# EAGLE board Qwiic_PT100-Panel (EAGLE 9.6.0), part 1 of 4
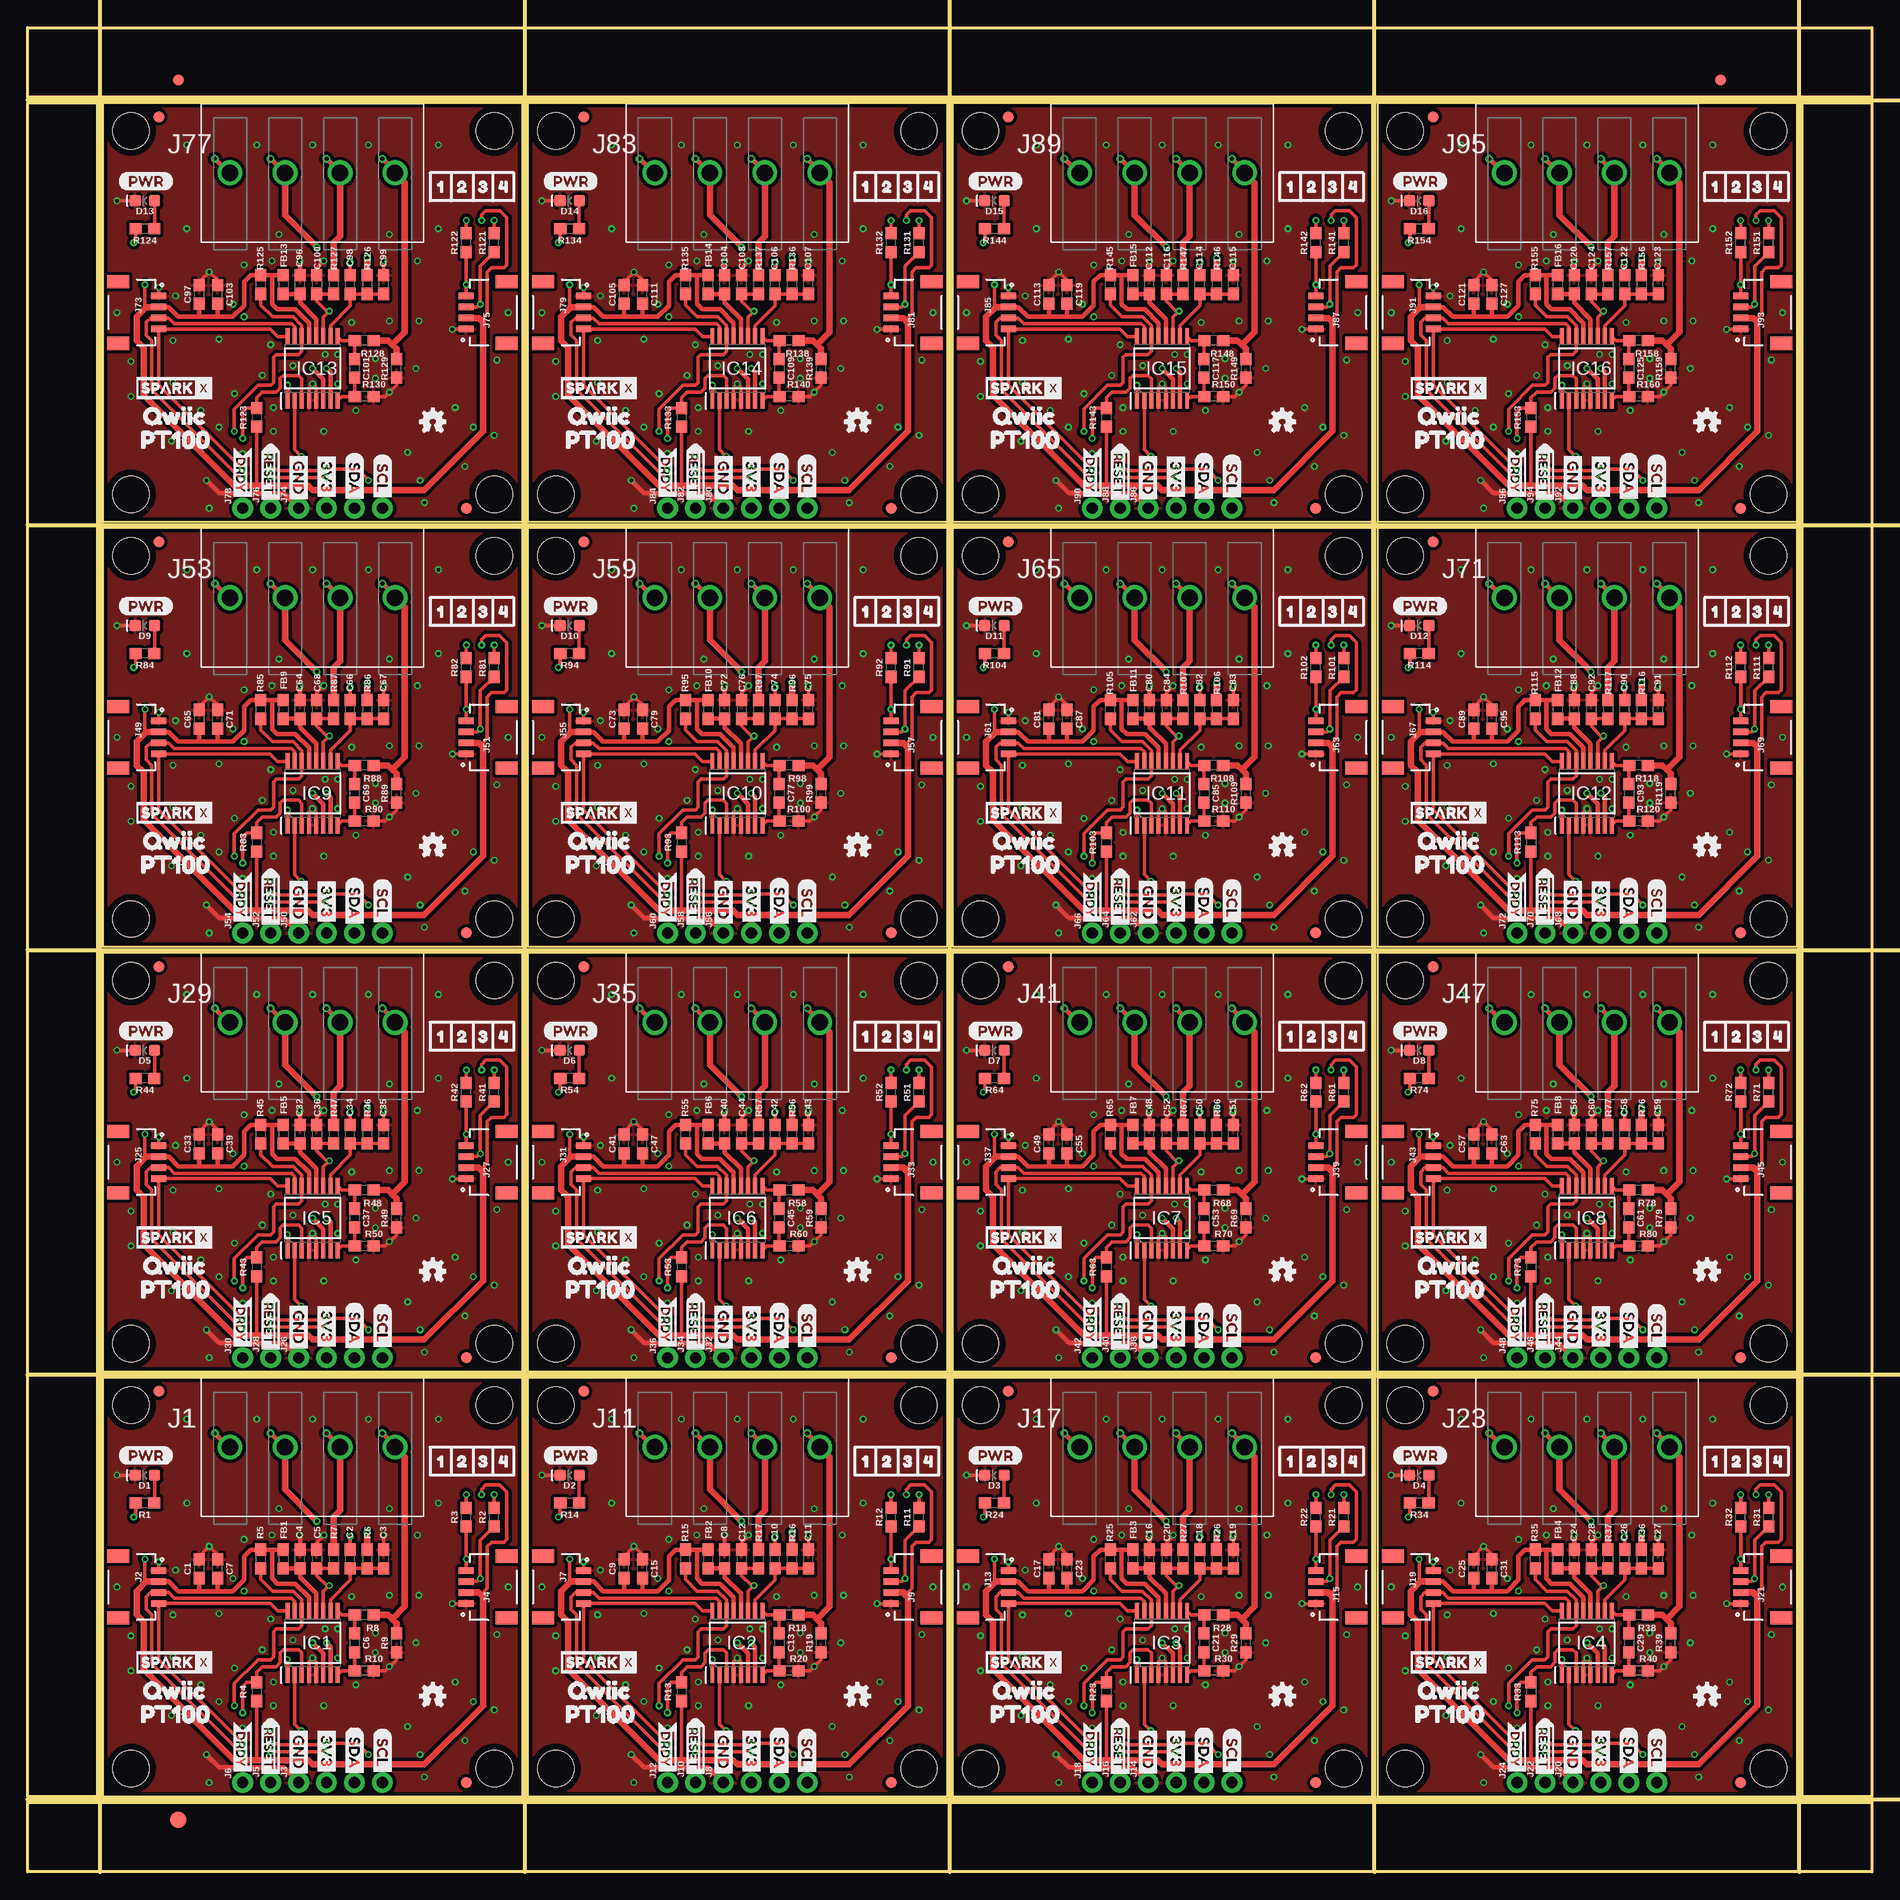
[diagram p0: board, top side]
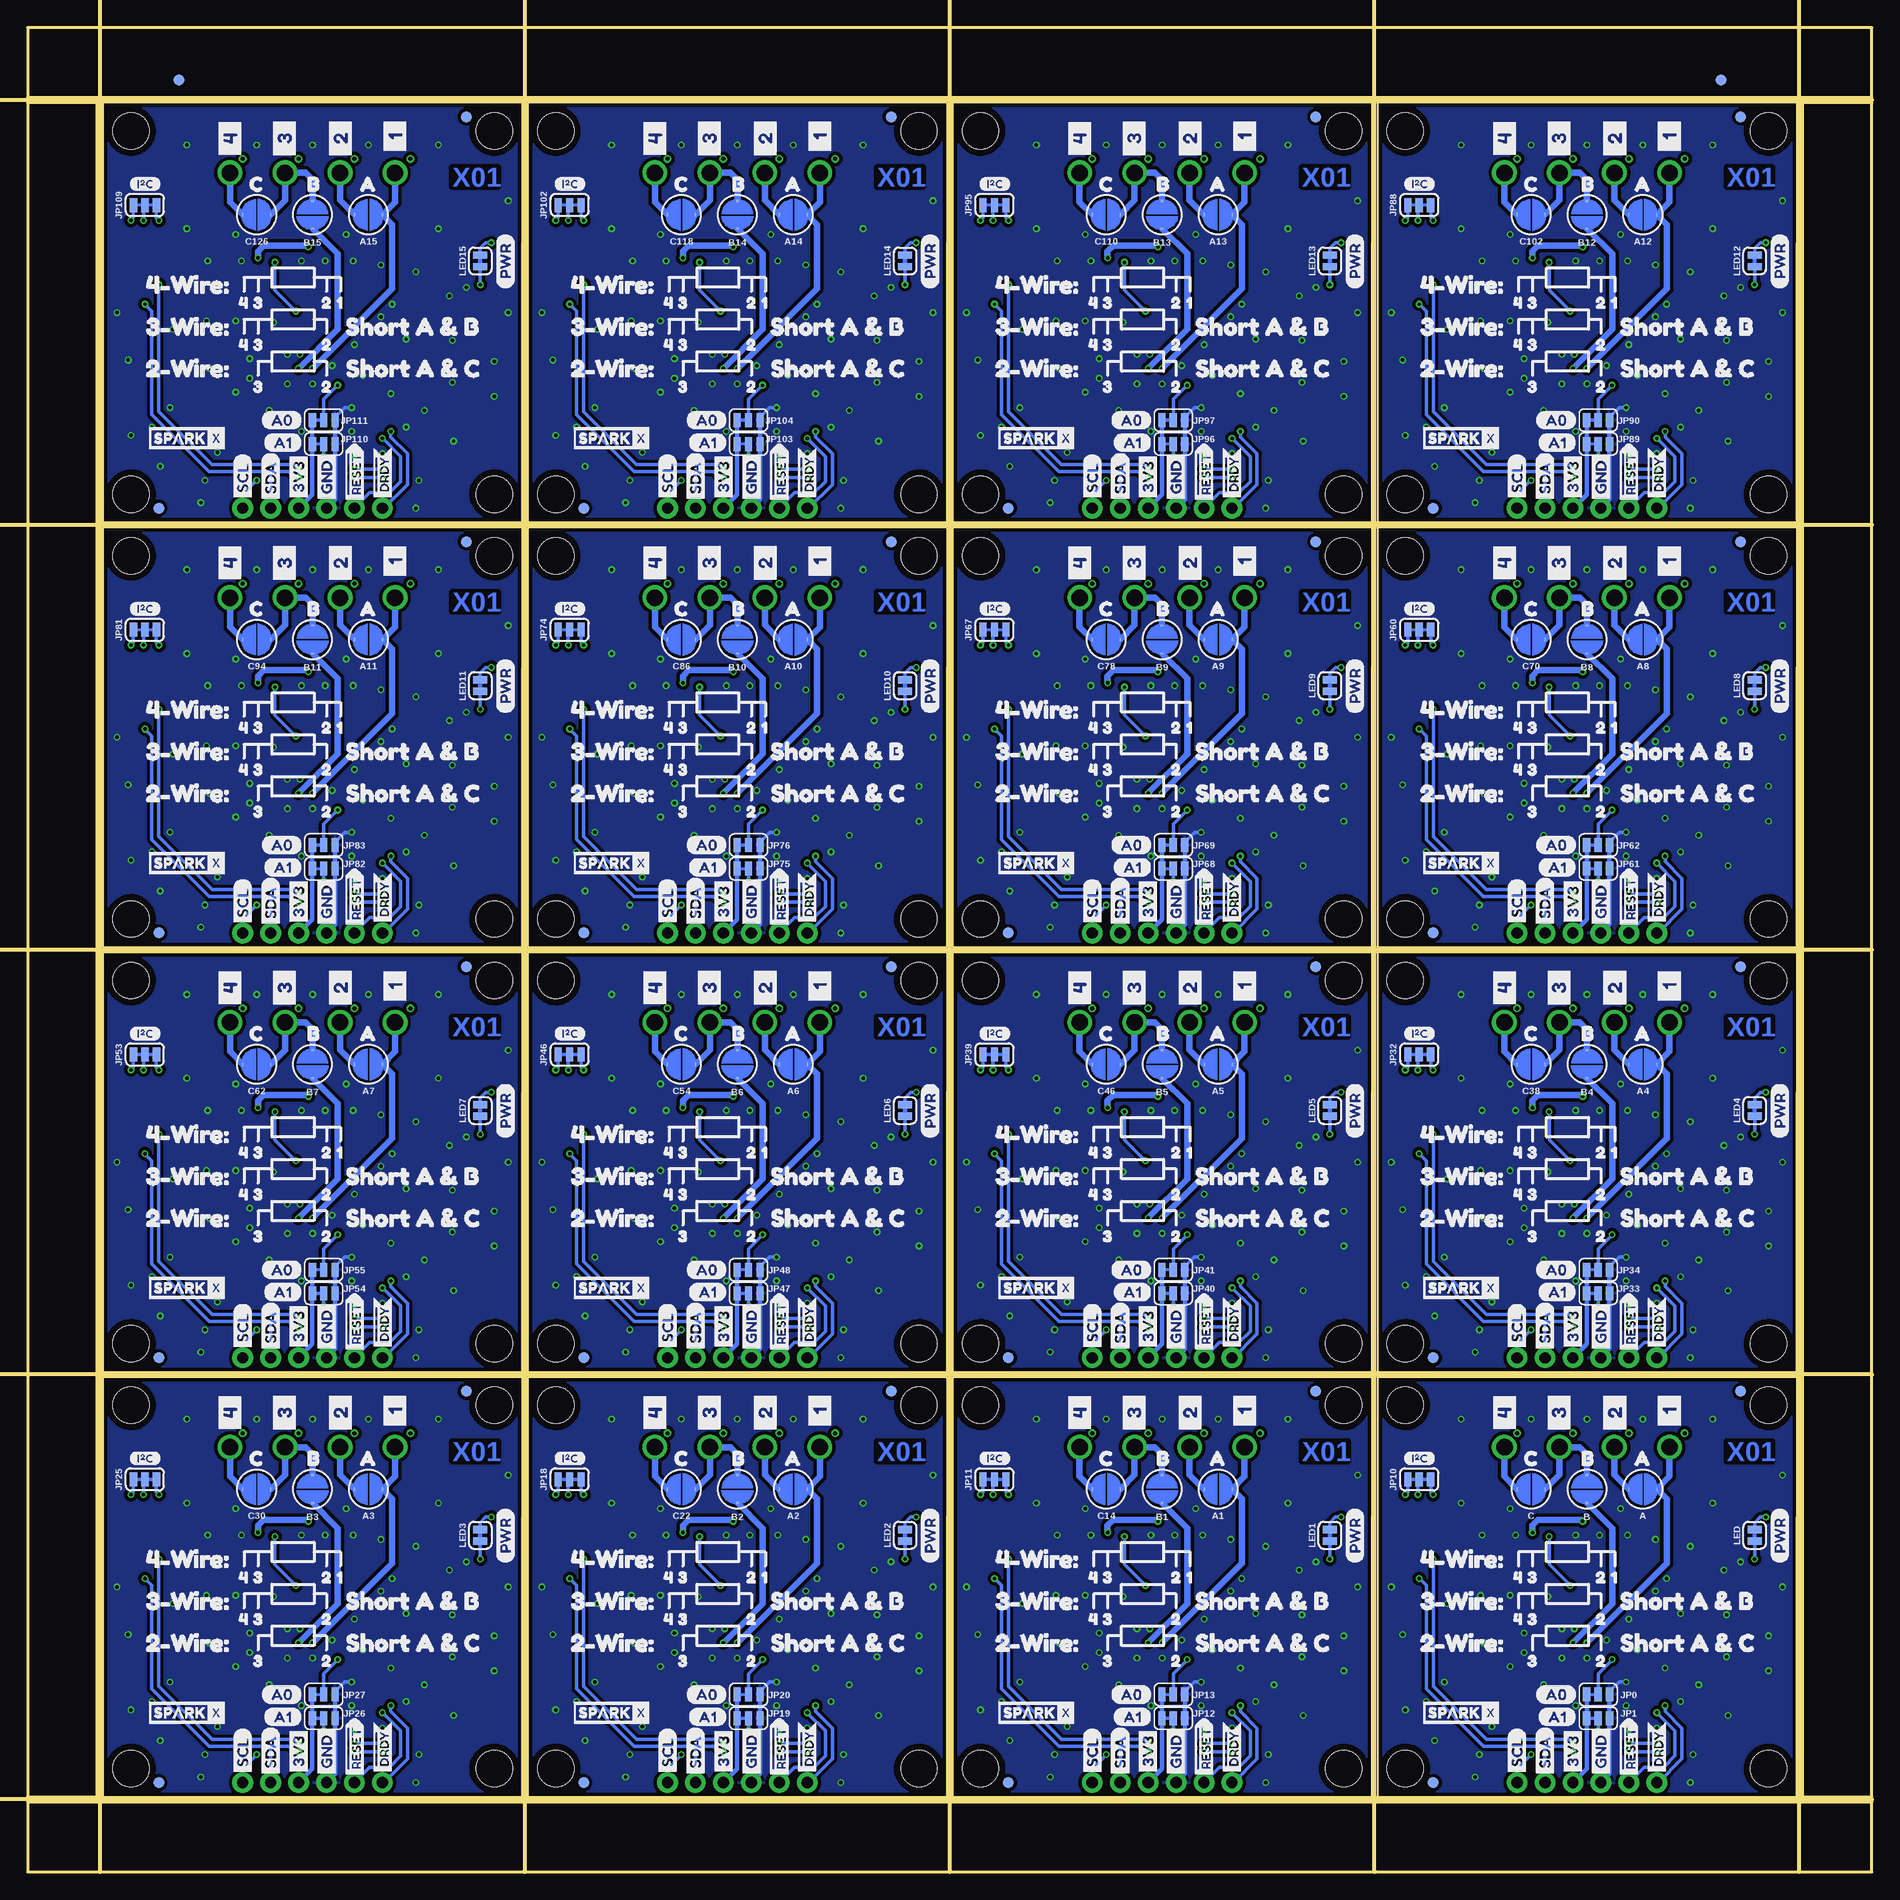
[diagram p1: board, bottom side, seen from below]

Size 167.64 x 167.64 mm. Coordinates in mm from the lower left corner, seen from the top.
Outline: 6.86,44.96 44.96,44.96 44.96,6.86 6.86,6.86 6.86,44.96
Outline: 45.47,44.96 83.57,44.96 83.57,6.86 45.47,6.86 45.47,44.96
Outline: 84.07,44.96 122.17,44.96 122.17,6.86 84.07,6.86 84.07,44.96
Outline: 122.68,44.96 160.78,44.96 160.78,6.86 122.68,6.86 122.68,44.96
Outline: 6.86,83.57 44.96,83.57 44.96,45.47 6.86,45.47 6.86,83.57
Outline: 45.47,83.57 83.57,83.57 83.57,45.47 45.47,45.47 45.47,83.57
Outline: 84.07,83.57 122.17,83.57 122.17,45.47 84.07,45.47 84.07,83.57
Outline: 122.68,83.57 160.78,83.57 160.78,45.47 122.68,45.47 122.68,83.57
Outline: 6.86,122.17 44.96,122.17 44.96,84.07 6.86,84.07 6.86,122.17
Outline: 45.47,122.17 83.57,122.17 83.57,84.07 45.47,84.07 45.47,122.17
Outline: 84.07,122.17 122.17,122.17 122.17,84.07 84.07,84.07 84.07,122.17
Outline: 122.68,122.17 160.78,122.17 160.78,84.07 122.68,84.07 122.68,122.17
Outline: 6.86,160.78 44.96,160.78 44.96,122.68 6.86,122.68 6.86,160.78
Outline: 45.47,160.78 83.57,160.78 83.57,122.68 45.47,122.68 45.47,160.78
Outline: 84.07,160.78 122.17,160.78 122.17,122.68 84.07,122.68 84.07,160.78
Outline: 122.68,160.78 160.78,160.78 160.78,122.68 122.68,122.68 122.68,160.78
Outline: 0,6.35 167.64,6.35 167.64,0 0,0 0,6.35
Outline: 161.29,160.78 167.64,160.78 167.64,6.86 161.29,6.86 161.29,160.78
Outline: 0,167.64 167.64,167.64 167.64,161.29 0,161.29 0,167.64
Outline: 0,160.78 6.35,160.78 6.35,6.86 0,6.86 0,160.78
Copper layers (1*16): Top 0.035mm / dielectric 1.5mm / Bottom 0.035mm
Design rules "Qwiic_PT100": minimum track width 6mil, minimum drill 0.3mm, track to track 6mil, track to pad 6mil, pad to pad 6mil, via to via 6mil, smd to smd 6mil, copper to edge 6mil, drill to drill 6mil, minimum pad ring 6mil, minimum via ring 6mil, stop-mask expansion 4mil, vias tented up to drill 25mil, thermal gap 10mil
Milling: 10 lines

## Footprints (pad centres in the part's own frame; a part is rotated, then mirrored left to right if it is on the bottom)
SMT-JUMPER_2_NO_SILK_ROUND = smd 0.152 x 0.305: 1 -1.27,0; 2 1.27,0
0603 = smd 1.1 x 1: 1 -0.85,0; 2 0.85,0
LED-0603 = smd 1 x 1: A -0.877,0; C 0.877,0
FIDUCIAL-1X2 = smd 1 x 1: 1 0,0
FIDUCIAL-1.5X3 = smd 1.5 x 1.5: 1 0,0
STAND-OFF = hole 3.302: 0,0
SOP65P640X120-16N = smd 1.5 x 0.45: 1 -2.9,2.275; 2 -2.9,1.625; 3 -2.9,0.975; 4 -2.9,0.325; 5 -2.9,-0.325; 6 -2.9,-0.975; 7 -2.9,-1.625; 8 -2.9,-2.275; 9 2.9,-2.275; 10 2.9,-1.625; 11 2.9,-0.975; 12 2.9,-0.325; 13 2.9,0.325; 14 2.9,0.975; 15 2.9,1.625; 16 2.9,2.275
LATCHTERMINAL-5MM-4 = drill 1.5: 1 -7.5,0; 2 -2.5,0; 3 2.5,0; 4 7.5,0
JST04_1MM_RA = smd 0.6 x 1.35: 1 -1.5,0; 2 -0.5,0; 3 0.5,0; 4 1.5,0 | smd 1.2 x 2: NC1 2.8,-3.675; NC2 -2.8,-3.675
1X04_NO_SILK = drill 1.016 pad 1.88: 1 0,0; 2 2.54,0; 3 5.08,0; 4 7.62,0
1X01_NO_SILK = drill 1.016 pad 1.88: 1 0,0
SMT-JUMPER_3_1-NC_TRACE_SILK = smd 0.66 x 1.27: 1 -1.041,0; 2 0,0; 3 1.041,0
SMT-JUMPER_3_2-NC_TRACE_SILK = smd 0.66 x 1.27: 1 -1.041,0; 2 0,0; 3 1.041,0
SMT-JUMPER_2_NC_TRACE_SILK = smd 0.66 x 1.27: 1 -0.521,0; 2 0.521,0
TP_15TH = drill 0.381 pad 0.61: P$1 0,0

## Placement (x,y rotation side)
A  JUMPER-SMT_2_NO_SILK_ROUND  [SMT-JUMPER_2_NO_SILK_ROUND]  20.83,34.8 0 bottom
A1  JUMPER-SMT_2_NO_SILK_ROUND  [SMT-JUMPER_2_NO_SILK_ROUND]  59.44,34.8 0 bottom
A2  JUMPER-SMT_2_NO_SILK_ROUND  [SMT-JUMPER_2_NO_SILK_ROUND]  98.04,34.8 0 bottom
A3  JUMPER-SMT_2_NO_SILK_ROUND  [SMT-JUMPER_2_NO_SILK_ROUND]  136.65,34.8 0 bottom
A4  JUMPER-SMT_2_NO_SILK_ROUND  [SMT-JUMPER_2_NO_SILK_ROUND]  20.83,73.41 0 bottom
A5  JUMPER-SMT_2_NO_SILK_ROUND  [SMT-JUMPER_2_NO_SILK_ROUND]  59.44,73.41 0 bottom
A6  JUMPER-SMT_2_NO_SILK_ROUND  [SMT-JUMPER_2_NO_SILK_ROUND]  98.04,73.41 0 bottom
A7  JUMPER-SMT_2_NO_SILK_ROUND  [SMT-JUMPER_2_NO_SILK_ROUND]  136.65,73.41 0 bottom
A8  JUMPER-SMT_2_NO_SILK_ROUND  [SMT-JUMPER_2_NO_SILK_ROUND]  20.83,112.01 0 bottom
A9  JUMPER-SMT_2_NO_SILK_ROUND  [SMT-JUMPER_2_NO_SILK_ROUND]  59.44,112.01 0 bottom
A10  JUMPER-SMT_2_NO_SILK_ROUND  [SMT-JUMPER_2_NO_SILK_ROUND]  98.04,112.01 0 bottom
A11  JUMPER-SMT_2_NO_SILK_ROUND  [SMT-JUMPER_2_NO_SILK_ROUND]  136.65,112.01 0 bottom
A12  JUMPER-SMT_2_NO_SILK_ROUND  [SMT-JUMPER_2_NO_SILK_ROUND]  20.83,150.62 0 bottom
A13  JUMPER-SMT_2_NO_SILK_ROUND  [SMT-JUMPER_2_NO_SILK_ROUND]  59.44,150.62 0 bottom
A14  JUMPER-SMT_2_NO_SILK_ROUND  [SMT-JUMPER_2_NO_SILK_ROUND]  98.04,150.62 0 bottom
A15  JUMPER-SMT_2_NO_SILK_ROUND  [SMT-JUMPER_2_NO_SILK_ROUND]  136.65,150.62 0 bottom
B  JUMPER-SMT_2_NO_SILK_ROUND  [SMT-JUMPER_2_NO_SILK_ROUND]  25.91,34.8 90 bottom
B1  JUMPER-SMT_2_NO_SILK_ROUND  [SMT-JUMPER_2_NO_SILK_ROUND]  64.52,34.8 90 bottom
B2  JUMPER-SMT_2_NO_SILK_ROUND  [SMT-JUMPER_2_NO_SILK_ROUND]  103.12,34.8 90 bottom
B3  JUMPER-SMT_2_NO_SILK_ROUND  [SMT-JUMPER_2_NO_SILK_ROUND]  141.73,34.8 90 bottom
B4  JUMPER-SMT_2_NO_SILK_ROUND  [SMT-JUMPER_2_NO_SILK_ROUND]  25.91,73.41 90 bottom
B5  JUMPER-SMT_2_NO_SILK_ROUND  [SMT-JUMPER_2_NO_SILK_ROUND]  64.52,73.41 90 bottom
B6  JUMPER-SMT_2_NO_SILK_ROUND  [SMT-JUMPER_2_NO_SILK_ROUND]  103.12,73.41 90 bottom
B7  JUMPER-SMT_2_NO_SILK_ROUND  [SMT-JUMPER_2_NO_SILK_ROUND]  141.73,73.41 90 bottom
B8  JUMPER-SMT_2_NO_SILK_ROUND  [SMT-JUMPER_2_NO_SILK_ROUND]  25.91,112.01 90 bottom
B9  JUMPER-SMT_2_NO_SILK_ROUND  [SMT-JUMPER_2_NO_SILK_ROUND]  64.52,112.01 90 bottom
B10  JUMPER-SMT_2_NO_SILK_ROUND  [SMT-JUMPER_2_NO_SILK_ROUND]  103.12,112.01 90 bottom
B11  JUMPER-SMT_2_NO_SILK_ROUND  [SMT-JUMPER_2_NO_SILK_ROUND]  141.73,112.01 90 bottom
B12  JUMPER-SMT_2_NO_SILK_ROUND  [SMT-JUMPER_2_NO_SILK_ROUND]  25.91,150.62 90 bottom
B13  JUMPER-SMT_2_NO_SILK_ROUND  [SMT-JUMPER_2_NO_SILK_ROUND]  64.52,150.62 90 bottom
B14  JUMPER-SMT_2_NO_SILK_ROUND  [SMT-JUMPER_2_NO_SILK_ROUND]  103.12,150.62 90 bottom
B15  JUMPER-SMT_2_NO_SILK_ROUND  [SMT-JUMPER_2_NO_SILK_ROUND]  141.73,150.62 90 bottom
C  JUMPER-SMT_2_NO_SILK_ROUND  [SMT-JUMPER_2_NO_SILK_ROUND]  30.99,34.8 0 bottom
C1  0.1uF  [0603]  15.62,27.56 90 top
C2  0.1uF  [0603]  29.34,28.45 90 top
C3  10nF  [0603]  32.38,28.45 90 top
C4  0.1uF  [0603]  24.77,28.45 90 top
C5  10nF  [0603]  26.29,28.45 270 top
C6  47nF  [0603]  29.72,20.83 270 top
C7  1.0uF  [0603]  17.27,27.56 90 top
C8  0.1uF  [0603]  63.37,28.45 90 top
C9  0.1uF  [0603]  54.23,27.56 90 top
C10  0.1uF  [0603]  67.95,28.45 90 top
C11  10nF  [0603]  70.99,28.45 90 top
C12  10nF  [0603]  64.9,28.45 270 top
C13  47nF  [0603]  68.33,20.83 270 top
C14  JUMPER-SMT_2_NO_SILK_ROUND  [SMT-JUMPER_2_NO_SILK_ROUND]  69.6,34.8 0 bottom
C15  1.0uF  [0603]  55.88,27.56 90 top
C16  0.1uF  [0603]  101.98,28.45 90 top
C17  0.1uF  [0603]  92.84,27.56 90 top
C18  0.1uF  [0603]  106.55,28.45 90 top
C19  10nF  [0603]  109.6,28.45 90 top
C20  10nF  [0603]  103.51,28.45 270 top
C21  47nF  [0603]  106.93,20.83 270 top
C22  JUMPER-SMT_2_NO_SILK_ROUND  [SMT-JUMPER_2_NO_SILK_ROUND]  108.2,34.8 0 bottom
C23  1.0uF  [0603]  94.49,27.56 90 top
C24  0.1uF  [0603]  140.59,28.45 90 top
C25  0.1uF  [0603]  131.44,27.56 90 top
C26  0.1uF  [0603]  145.16,28.45 90 top
C27  10nF  [0603]  148.21,28.45 90 top
C28  10nF  [0603]  142.11,28.45 270 top
C29  47nF  [0603]  145.54,20.83 270 top
C30  JUMPER-SMT_2_NO_SILK_ROUND  [SMT-JUMPER_2_NO_SILK_ROUND]  146.81,34.8 0 bottom
C31  1.0uF  [0603]  133.1,27.56 90 top
C32  0.1uF  [0603]  24.77,67.06 90 top
C33  0.1uF  [0603]  15.62,66.17 90 top
C34  0.1uF  [0603]  29.34,67.06 90 top
C35  10nF  [0603]  32.38,67.06 90 top
C36  10nF  [0603]  26.29,67.06 270 top
C37  47nF  [0603]  29.72,59.44 270 top
C38  JUMPER-SMT_2_NO_SILK_ROUND  [SMT-JUMPER_2_NO_SILK_ROUND]  30.99,73.41 0 bottom
C39  1.0uF  [0603]  17.27,66.17 90 top
C40  0.1uF  [0603]  63.37,67.06 90 top
C41  0.1uF  [0603]  54.23,66.17 90 top
C42  0.1uF  [0603]  67.95,67.06 90 top
C43  10nF  [0603]  70.99,67.06 90 top
C44  10nF  [0603]  64.9,67.06 270 top
C45  47nF  [0603]  68.33,59.44 270 top
C46  JUMPER-SMT_2_NO_SILK_ROUND  [SMT-JUMPER_2_NO_SILK_ROUND]  69.6,73.41 0 bottom
C47  1.0uF  [0603]  55.88,66.17 90 top
C48  0.1uF  [0603]  101.98,67.06 90 top
C49  0.1uF  [0603]  92.84,66.17 90 top
C50  0.1uF  [0603]  106.55,67.06 90 top
C51  10nF  [0603]  109.6,67.06 90 top
C52  10nF  [0603]  103.51,67.06 270 top
C53  47nF  [0603]  106.93,59.44 270 top
C54  JUMPER-SMT_2_NO_SILK_ROUND  [SMT-JUMPER_2_NO_SILK_ROUND]  108.2,73.41 0 bottom
C55  1.0uF  [0603]  94.49,66.17 90 top
C56  0.1uF  [0603]  140.59,67.06 90 top
C57  0.1uF  [0603]  131.44,66.17 90 top
C58  0.1uF  [0603]  145.16,67.06 90 top
C59  10nF  [0603]  148.21,67.06 90 top
C60  10nF  [0603]  142.11,67.06 270 top
C61  47nF  [0603]  145.54,59.44 270 top
C62  JUMPER-SMT_2_NO_SILK_ROUND  [SMT-JUMPER_2_NO_SILK_ROUND]  146.81,73.41 0 bottom
C63  1.0uF  [0603]  133.1,66.17 90 top
C64  0.1uF  [0603]  24.77,105.66 90 top
C65  0.1uF  [0603]  15.62,104.78 90 top
C66  0.1uF  [0603]  29.34,105.66 90 top
C67  10nF  [0603]  32.38,105.66 90 top
C68  10nF  [0603]  26.29,105.66 270 top
C69  47nF  [0603]  29.72,98.04 270 top
C70  JUMPER-SMT_2_NO_SILK_ROUND  [SMT-JUMPER_2_NO_SILK_ROUND]  30.99,112.01 0 bottom
C71  1.0uF  [0603]  17.27,104.78 90 top
C72  0.1uF  [0603]  63.37,105.66 90 top
C73  0.1uF  [0603]  54.23,104.78 90 top
C74  0.1uF  [0603]  67.95,105.66 90 top
C75  10nF  [0603]  70.99,105.66 90 top
C76  10nF  [0603]  64.9,105.66 270 top
C77  47nF  [0603]  68.33,98.04 270 top
C78  JUMPER-SMT_2_NO_SILK_ROUND  [SMT-JUMPER_2_NO_SILK_ROUND]  69.6,112.01 0 bottom
C79  1.0uF  [0603]  55.88,104.78 90 top
C80  0.1uF  [0603]  101.98,105.66 90 top
C81  0.1uF  [0603]  92.84,104.78 90 top
C82  0.1uF  [0603]  106.55,105.66 90 top
C83  10nF  [0603]  109.6,105.66 90 top
C84  10nF  [0603]  103.51,105.66 270 top
C85  47nF  [0603]  106.93,98.04 270 top
C86  JUMPER-SMT_2_NO_SILK_ROUND  [SMT-JUMPER_2_NO_SILK_ROUND]  108.2,112.01 0 bottom
C87  1.0uF  [0603]  94.49,104.78 90 top
C88  0.1uF  [0603]  140.59,105.66 90 top
C89  0.1uF  [0603]  131.44,104.78 90 top
C90  0.1uF  [0603]  145.16,105.66 90 top
C91  10nF  [0603]  148.21,105.66 90 top
C92  10nF  [0603]  142.11,105.66 270 top
C93  47nF  [0603]  145.54,98.04 270 top
C94  JUMPER-SMT_2_NO_SILK_ROUND  [SMT-JUMPER_2_NO_SILK_ROUND]  146.81,112.01 0 bottom
C95  1.0uF  [0603]  133.1,104.78 90 top
C96  0.1uF  [0603]  24.77,144.27 90 top
C97  0.1uF  [0603]  15.62,143.38 90 top
C98  0.1uF  [0603]  29.34,144.27 90 top
C99  10nF  [0603]  32.38,144.27 90 top
C100  10nF  [0603]  26.29,144.27 270 top
C101  47nF  [0603]  29.72,136.65 270 top
C102  JUMPER-SMT_2_NO_SILK_ROUND  [SMT-JUMPER_2_NO_SILK_ROUND]  30.99,150.62 0 bottom
C103  1.0uF  [0603]  17.27,143.38 90 top
C104  0.1uF  [0603]  63.37,144.27 90 top
C105  0.1uF  [0603]  54.23,143.38 90 top
C106  0.1uF  [0603]  67.95,144.27 90 top
C107  10nF  [0603]  70.99,144.27 90 top
C108  10nF  [0603]  64.9,144.27 270 top
C109  47nF  [0603]  68.33,136.65 270 top
C110  JUMPER-SMT_2_NO_SILK_ROUND  [SMT-JUMPER_2_NO_SILK_ROUND]  69.6,150.62 0 bottom
C111  1.0uF  [0603]  55.88,143.38 90 top
C112  0.1uF  [0603]  101.98,144.27 90 top
C113  0.1uF  [0603]  92.84,143.38 90 top
C114  0.1uF  [0603]  106.55,144.27 90 top
C115  10nF  [0603]  109.6,144.27 90 top
C116  10nF  [0603]  103.51,144.27 270 top
C117  47nF  [0603]  106.93,136.65 270 top
C118  JUMPER-SMT_2_NO_SILK_ROUND  [SMT-JUMPER_2_NO_SILK_ROUND]  108.2,150.62 0 bottom
C119  1.0uF  [0603]  94.49,143.38 90 top
C120  0.1uF  [0603]  140.59,144.27 90 top
C121  0.1uF  [0603]  131.44,143.38 90 top
C122  0.1uF  [0603]  145.16,144.27 90 top
C123  10nF  [0603]  148.21,144.27 90 top
C124  10nF  [0603]  142.11,144.27 270 top
C125  47nF  [0603]  145.54,136.65 270 top
C126  JUMPER-SMT_2_NO_SILK_ROUND  [SMT-JUMPER_2_NO_SILK_ROUND]  146.81,150.62 0 bottom
C127  1.0uF  [0603]  133.1,143.38 90 top
D1  RED  [LED-0603]  10.67,36.07 180 top
D2  RED  [LED-0603]  49.28,36.07 180 top
D3  RED  [LED-0603]  87.88,36.07 180 top
D4  RED  [LED-0603]  126.49,36.07 180 top
D5  RED  [LED-0603]  10.67,74.68 180 top
D6  RED  [LED-0603]  49.28,74.68 180 top
D7  RED  [LED-0603]  87.88,74.68 180 top
D8  RED  [LED-0603]  126.49,74.68 180 top
D9  RED  [LED-0603]  10.67,113.28 180 top
D10  RED  [LED-0603]  49.28,113.28 180 top
D11  RED  [LED-0603]  87.88,113.28 180 top
D12  RED  [LED-0603]  126.49,113.28 180 top
D13  RED  [LED-0603]  10.67,151.89 180 top
D14  RED  [LED-0603]  49.28,151.89 180 top
D15  RED  [LED-0603]  87.88,151.89 180 top
D16  RED  [LED-0603]  126.49,151.89 180 top
E$1  [FIDUCIAL-1X2]  13.72,162.88 0 top
E$2  [FIDUCIAL-1X2]  13.72,162.88 0 bottom
E$3  [FIDUCIAL-1X2]  153.86,162.88 0 top
E$4  [FIDUCIAL-1X2]  153.86,162.88 0 bottom
E$5  [FIDUCIAL-1.5X3]  13.72,4.76 0 top
FB1  30Ω/1.8A  [0603]  23.24,28.45 270 top
FB2  30Ω/1.8A  [0603]  61.85,28.45 270 top
FB3  30Ω/1.8A  [0603]  100.46,28.45 270 top
FB4  30Ω/1.8A  [0603]  139.06,28.45 270 top
FB5  30Ω/1.8A  [0603]  23.24,67.06 270 top
FB6  30Ω/1.8A  [0603]  61.85,67.06 270 top
FB7  30Ω/1.8A  [0603]  100.46,67.06 270 top
FB8  30Ω/1.8A  [0603]  139.06,67.06 270 top
FB9  30Ω/1.8A  [0603]  23.24,105.66 270 top
FB10  30Ω/1.8A  [0603]  61.85,105.66 270 top
FB11  30Ω/1.8A  [0603]  100.46,105.66 270 top
FB12  30Ω/1.8A  [0603]  139.06,105.66 270 top
FB13  30Ω/1.8A  [0603]  23.24,144.27 270 top
FB14  30Ω/1.8A  [0603]  61.85,144.27 270 top
FB15  30Ω/1.8A  [0603]  100.46,144.27 270 top
FB16  30Ω/1.8A  [0603]  139.06,144.27 270 top
FD1  FIDUCIAL1X2  [FIDUCIAL-1X2]  11.94,43.69 0 bottom
FD2  FIDUCIAL1X2  [FIDUCIAL-1X2]  39.88,8.13 270 bottom
FD3  FIDUCIAL1X2  [FIDUCIAL-1X2]  50.55,43.69 0 bottom
FD4  FIDUCIAL1X2  [FIDUCIAL-1X2]  78.49,8.13 270 bottom
FD5  FIDUCIAL1X2  [FIDUCIAL-1X2]  89.15,43.69 0 bottom
FD6  FIDUCIAL1X2  [FIDUCIAL-1X2]  117.09,8.13 270 bottom
FD7  FIDUCIAL1X2  [FIDUCIAL-1X2]  127.76,43.69 0 bottom
FD8  FIDUCIAL1X2  [FIDUCIAL-1X2]  155.7,8.13 270 bottom
FD9  FIDUCIAL1X2  [FIDUCIAL-1X2]  11.94,82.3 0 bottom
FD10  FIDUCIAL1X2  [FIDUCIAL-1X2]  39.88,46.74 270 bottom
FD11  FIDUCIAL1X2  [FIDUCIAL-1X2]  50.55,82.3 0 bottom
FD12  FIDUCIAL1X2  [FIDUCIAL-1X2]  78.49,46.74 270 bottom
FD13  FIDUCIAL1X2  [FIDUCIAL-1X2]  89.15,82.3 0 bottom
FD14  FIDUCIAL1X2  [FIDUCIAL-1X2]  117.09,46.74 270 bottom
FD15  FIDUCIAL1X2  [FIDUCIAL-1X2]  127.76,82.3 0 bottom
FD16  FIDUCIAL1X2  [FIDUCIAL-1X2]  155.7,46.74 270 bottom
FD17  FIDUCIAL1X2  [FIDUCIAL-1X2]  11.94,120.9 0 bottom
FD18  FIDUCIAL1X2  [FIDUCIAL-1X2]  39.88,85.34 270 bottom
FD19  FIDUCIAL1X2  [FIDUCIAL-1X2]  50.55,120.9 0 bottom
FD20  FIDUCIAL1X2  [FIDUCIAL-1X2]  78.49,85.34 270 bottom
FD21  FIDUCIAL1X2  [FIDUCIAL-1X2]  89.15,120.9 0 bottom
FD22  FIDUCIAL1X2  [FIDUCIAL-1X2]  117.09,85.34 270 bottom
FD23  FIDUCIAL1X2  [FIDUCIAL-1X2]  127.76,120.9 0 bottom
FD24  FIDUCIAL1X2  [FIDUCIAL-1X2]  155.7,85.34 270 bottom
FD25  FIDUCIAL1X2  [FIDUCIAL-1X2]  11.94,159.51 0 bottom
FD26  FIDUCIAL1X2  [FIDUCIAL-1X2]  39.88,123.95 270 bottom
FD27  FIDUCIAL1X2  [FIDUCIAL-1X2]  50.55,159.51 0 bottom
FD28  FIDUCIAL1X2  [FIDUCIAL-1X2]  78.49,123.95 270 bottom
FD29  FIDUCIAL1X2  [FIDUCIAL-1X2]  89.15,159.51 0 bottom
FD30  FIDUCIAL1X2  [FIDUCIAL-1X2]  117.09,123.95 270 bottom
FD31  FIDUCIAL1X2  [FIDUCIAL-1X2]  127.76,159.51 0 bottom
FD32  FIDUCIAL1X2  [FIDUCIAL-1X2]  155.7,123.95 270 bottom
H1  STAND-OFF  [STAND-OFF]  42.42,42.42 0 top
H2  STAND-OFF  [STAND-OFF]  9.4,42.42 0 top
H3  STAND-OFF  [STAND-OFF]  81.03,42.42 0 top
H4  STAND-OFF  [STAND-OFF]  48.01,42.42 0 top
H5  STAND-OFF  [STAND-OFF]  119.63,42.42 0 top
H6  STAND-OFF  [STAND-OFF]  86.61,42.42 0 top
H7  STAND-OFF  [STAND-OFF]  158.24,42.42 0 top
H8  STAND-OFF  [STAND-OFF]  125.22,42.42 0 top
H9  STAND-OFF  [STAND-OFF]  42.42,81.03 0 top
H10  STAND-OFF  [STAND-OFF]  9.4,81.03 0 top
H11  STAND-OFF  [STAND-OFF]  81.03,81.03 0 top
H12  STAND-OFF  [STAND-OFF]  48.01,81.03 0 top
H13  STAND-OFF  [STAND-OFF]  119.63,81.03 0 top
H14  STAND-OFF  [STAND-OFF]  86.61,81.03 0 top
H15  STAND-OFF  [STAND-OFF]  158.24,81.03 0 top
H16  STAND-OFF  [STAND-OFF]  125.22,81.03 0 top
H17  STAND-OFF  [STAND-OFF]  42.42,119.63 0 top
H18  STAND-OFF  [STAND-OFF]  9.4,119.63 0 top
H19  STAND-OFF  [STAND-OFF]  81.03,119.63 0 top
H20  STAND-OFF  [STAND-OFF]  48.01,119.63 0 top
H21  STAND-OFF  [STAND-OFF]  119.63,119.63 0 top
H22  STAND-OFF  [STAND-OFF]  86.61,119.63 0 top
H23  STAND-OFF  [STAND-OFF]  158.24,119.63 0 top
H24  STAND-OFF  [STAND-OFF]  125.22,119.63 0 top
H25  STAND-OFF  [STAND-OFF]  42.42,158.24 0 top
H26  STAND-OFF  [STAND-OFF]  9.4,158.24 0 top
H27  STAND-OFF  [STAND-OFF]  81.03,158.24 0 top
H28  STAND-OFF  [STAND-OFF]  48.01,158.24 0 top
H29  STAND-OFF  [STAND-OFF]  119.63,158.24 0 top
H30  STAND-OFF  [STAND-OFF]  86.61,158.24 0 top
H31  STAND-OFF  [STAND-OFF]  158.24,158.24 0 top
H32  STAND-OFF  [STAND-OFF]  125.22,158.24 0 top
IC1  ADS122C04IPWR  [SOP65P640X120-16N]  25.91,20.83 90 top
IC2  ADS122C04IPWR  [SOP65P640X120-16N]  64.52,20.83 90 top
IC3  ADS122C04IPWR  [SOP65P640X120-16N]  103.12,20.83 90 top
IC4  ADS122C04IPWR  [SOP65P640X120-16N]  141.73,20.83 90 top
IC5  ADS122C04IPWR  [SOP65P640X120-16N]  25.91,59.44 90 top
IC6  ADS122C04IPWR  [SOP65P640X120-16N]  64.52,59.44 90 top
IC7  ADS122C04IPWR  [SOP65P640X120-16N]  103.12,59.44 90 top
IC8  ADS122C04IPWR  [SOP65P640X120-16N]  141.73,59.44 90 top
IC9  ADS122C04IPWR  [SOP65P640X120-16N]  25.91,98.04 90 top
IC10  ADS122C04IPWR  [SOP65P640X120-16N]  64.52,98.04 90 top
IC11  ADS122C04IPWR  [SOP65P640X120-16N]  103.12,98.04 90 top
IC12  ADS122C04IPWR  [SOP65P640X120-16N]  141.73,98.04 90 top
IC13  ADS122C04IPWR  [SOP65P640X120-16N]  25.91,136.65 90 top
IC14  ADS122C04IPWR  [SOP65P640X120-16N]  64.52,136.65 90 top
IC15  ADS122C04IPWR  [SOP65P640X120-16N]  103.12,136.65 90 top
IC16  ADS122C04IPWR  [SOP65P640X120-16N]  141.73,136.65 90 top
J1  [LATCHTERMINAL-5MM-4]  25.91,38.61 0 top
J2  QWIIC_RIGHT_ANGLE  [JST04_1MM_RA]  11.94,25.91 270 top
J3  PTH  [1X04_NO_SILK]  24.64,8.13 0 top
J4  QWIIC_RIGHT_ANGLE  [JST04_1MM_RA]  39.88,25.91 90 top
J5  [1X01_NO_SILK]  22.1,8.13 0 top
J6  [1X01_NO_SILK]  19.56,8.13 0 top
J7  QWIIC_RIGHT_ANGLE  [JST04_1MM_RA]  50.55,25.91 270 top
J8  PTH  [1X04_NO_SILK]  63.25,8.13 0 top
J9  QWIIC_RIGHT_ANGLE  [JST04_1MM_RA]  78.49,25.91 90 top
J10  [1X01_NO_SILK]  60.71,8.13 0 top
J11  [LATCHTERMINAL-5MM-4]  64.52,38.61 0 top
J12  [1X01_NO_SILK]  58.17,8.13 0 top
J13  QWIIC_RIGHT_ANGLE  [JST04_1MM_RA]  89.15,25.91 270 top
J14  PTH  [1X04_NO_SILK]  101.85,8.13 0 top
J15  QWIIC_RIGHT_ANGLE  [JST04_1MM_RA]  117.09,25.91 90 top
J16  [1X01_NO_SILK]  99.31,8.13 0 top
J17  [LATCHTERMINAL-5MM-4]  103.12,38.61 0 top
J18  [1X01_NO_SILK]  96.77,8.13 0 top
J19  QWIIC_RIGHT_ANGLE  [JST04_1MM_RA]  127.76,25.91 270 top
J20  PTH  [1X04_NO_SILK]  140.46,8.13 0 top
J21  QWIIC_RIGHT_ANGLE  [JST04_1MM_RA]  155.7,25.91 90 top
J22  [1X01_NO_SILK]  137.92,8.13 0 top
J23  [LATCHTERMINAL-5MM-4]  141.73,38.61 0 top
J24  [1X01_NO_SILK]  135.38,8.13 0 top
J25  QWIIC_RIGHT_ANGLE  [JST04_1MM_RA]  11.94,64.52 270 top
J26  PTH  [1X04_NO_SILK]  24.64,46.74 0 top
J27  QWIIC_RIGHT_ANGLE  [JST04_1MM_RA]  39.88,64.52 90 top
J28  [1X01_NO_SILK]  22.1,46.74 0 top
J29  [LATCHTERMINAL-5MM-4]  25.91,77.22 0 top
J30  [1X01_NO_SILK]  19.56,46.74 0 top
J31  QWIIC_RIGHT_ANGLE  [JST04_1MM_RA]  50.55,64.52 270 top
J32  PTH  [1X04_NO_SILK]  63.25,46.74 0 top
J33  QWIIC_RIGHT_ANGLE  [JST04_1MM_RA]  78.49,64.52 90 top
J34  [1X01_NO_SILK]  60.71,46.74 0 top
J35  [LATCHTERMINAL-5MM-4]  64.52,77.22 0 top
J36  [1X01_NO_SILK]  58.17,46.74 0 top
J37  QWIIC_RIGHT_ANGLE  [JST04_1MM_RA]  89.15,64.52 270 top
J38  PTH  [1X04_NO_SILK]  101.85,46.74 0 top
J39  QWIIC_RIGHT_ANGLE  [JST04_1MM_RA]  117.09,64.52 90 top
J40  [1X01_NO_SILK]  99.31,46.74 0 top
J41  [LATCHTERMINAL-5MM-4]  103.12,77.22 0 top
J42  [1X01_NO_SILK]  96.77,46.74 0 top
J43  QWIIC_RIGHT_ANGLE  [JST04_1MM_RA]  127.76,64.52 270 top
J44  PTH  [1X04_NO_SILK]  140.46,46.74 0 top
J45  QWIIC_RIGHT_ANGLE  [JST04_1MM_RA]  155.7,64.52 90 top
J46  [1X01_NO_SILK]  137.92,46.74 0 top
J47  [LATCHTERMINAL-5MM-4]  141.73,77.22 0 top
J48  [1X01_NO_SILK]  135.38,46.74 0 top
J49  QWIIC_RIGHT_ANGLE  [JST04_1MM_RA]  11.94,103.12 270 top
J50  PTH  [1X04_NO_SILK]  24.64,85.34 0 top
J51  QWIIC_RIGHT_ANGLE  [JST04_1MM_RA]  39.88,103.12 90 top
J52  [1X01_NO_SILK]  22.1,85.34 0 top
J53  [LATCHTERMINAL-5MM-4]  25.91,115.82 0 top
J54  [1X01_NO_SILK]  19.56,85.34 0 top
J55  QWIIC_RIGHT_ANGLE  [JST04_1MM_RA]  50.55,103.12 270 top
J56  PTH  [1X04_NO_SILK]  63.25,85.34 0 top
J57  QWIIC_RIGHT_ANGLE  [JST04_1MM_RA]  78.49,103.12 90 top
J58  [1X01_NO_SILK]  60.71,85.34 0 top
J59  [LATCHTERMINAL-5MM-4]  64.52,115.82 0 top
J60  [1X01_NO_SILK]  58.17,85.34 0 top
J61  QWIIC_RIGHT_ANGLE  [JST04_1MM_RA]  89.15,103.12 270 top
J62  PTH  [1X04_NO_SILK]  101.85,85.34 0 top
J63  QWIIC_RIGHT_ANGLE  [JST04_1MM_RA]  117.09,103.12 90 top
J64  [1X01_NO_SILK]  99.31,85.34 0 top
J65  [LATCHTERMINAL-5MM-4]  103.12,115.82 0 top
J66  [1X01_NO_SILK]  96.77,85.34 0 top
J67  QWIIC_RIGHT_ANGLE  [JST04_1MM_RA]  127.76,103.12 270 top
J68  PTH  [1X04_NO_SILK]  140.46,85.34 0 top
J69  QWIIC_RIGHT_ANGLE  [JST04_1MM_RA]  155.7,103.12 90 top
J70  [1X01_NO_SILK]  137.92,85.34 0 top
J71  [LATCHTERMINAL-5MM-4]  141.73,115.82 0 top
J72  [1X01_NO_SILK]  135.38,85.34 0 top
J73  QWIIC_RIGHT_ANGLE  [JST04_1MM_RA]  11.94,141.73 270 top
J74  PTH  [1X04_NO_SILK]  24.64,123.95 0 top
J75  QWIIC_RIGHT_ANGLE  [JST04_1MM_RA]  39.88,141.73 90 top
J76  [1X01_NO_SILK]  22.1,123.95 0 top
J77  [LATCHTERMINAL-5MM-4]  25.91,154.43 0 top
J78  [1X01_NO_SILK]  19.56,123.95 0 top
J79  QWIIC_RIGHT_ANGLE  [JST04_1MM_RA]  50.55,141.73 270 top
J80  PTH  [1X04_NO_SILK]  63.25,123.95 0 top
J81  QWIIC_RIGHT_ANGLE  [JST04_1MM_RA]  78.49,141.73 90 top
J82  [1X01_NO_SILK]  60.71,123.95 0 top
J83  [LATCHTERMINAL-5MM-4]  64.52,154.43 0 top
J84  [1X01_NO_SILK]  58.17,123.95 0 top
J85  QWIIC_RIGHT_ANGLE  [JST04_1MM_RA]  89.15,141.73 270 top
J86  PTH  [1X04_NO_SILK]  101.85,123.95 0 top
J87  QWIIC_RIGHT_ANGLE  [JST04_1MM_RA]  117.09,141.73 90 top
J88  [1X01_NO_SILK]  99.31,123.95 0 top
J89  [LATCHTERMINAL-5MM-4]  103.12,154.43 0 top
J90  [1X01_NO_SILK]  96.77,123.95 0 top
J91  QWIIC_RIGHT_ANGLE  [JST04_1MM_RA]  127.76,141.73 270 top
J92  PTH  [1X04_NO_SILK]  140.46,123.95 0 top
J93  QWIIC_RIGHT_ANGLE  [JST04_1MM_RA]  155.7,141.73 90 top
J94  [1X01_NO_SILK]  137.92,123.95 0 top
J95  [LATCHTERMINAL-5MM-4]  141.73,154.43 0 top
J96  [1X01_NO_SILK]  135.38,123.95 0 top
JP0  JUMPER-SMT_3_1-NC_TRACE_SILK  [SMT-JUMPER_3_1-NC_TRACE_SILK]  24.89,16.13 180 bottom
JP1  JUMPER-SMT_3_1-NC_TRACE_SILK  [SMT-JUMPER_3_1-NC_TRACE_SILK]  24.89,13.97 180 bottom
JP2  FIDUCIAL1X2  [FIDUCIAL-1X2]  39.88,8.13 0 top
JP3  STAND-OFF  [STAND-OFF]  9.4,9.4 0 top
JP4  STAND-OFF  [STAND-OFF]  42.42,9.4 0 top
JP5  STAND-OFF  [STAND-OFF]  48.01,9.4 0 top
JP6  FIDUCIAL1X2  [FIDUCIAL-1X2]  11.94,43.69 0 top
JP7  STAND-OFF  [STAND-OFF]  81.03,9.4 0 top
JP8  FIDUCIAL1X2  [FIDUCIAL-1X2]  78.49,8.13 0 top
JP9  FIDUCIAL1X2  [FIDUCIAL-1X2]  50.55,43.69 0 top
JP10  JUMPER-SMT_3_2-NC_TRACE_SILK  [SMT-JUMPER_3_2-NC_TRACE_SILK]  41.15,35.69 0 bottom
JP11  JUMPER-SMT_3_2-NC_TRACE_SILK  [SMT-JUMPER_3_2-NC_TRACE_SILK]  79.76,35.69 0 bottom
JP12  JUMPER-SMT_3_1-NC_TRACE_SILK  [SMT-JUMPER_3_1-NC_TRACE_SILK]  63.5,13.97 180 bottom
JP13  JUMPER-SMT_3_1-NC_TRACE_SILK  [SMT-JUMPER_3_1-NC_TRACE_SILK]  63.5,16.13 180 bottom
JP14  STAND-OFF  [STAND-OFF]  86.61,9.4 0 top
JP15  STAND-OFF  [STAND-OFF]  119.63,9.4 0 top
JP16  FIDUCIAL1X2  [FIDUCIAL-1X2]  117.09,8.13 0 top
JP17  FIDUCIAL1X2  [FIDUCIAL-1X2]  89.15,43.69 0 top
JP18  JUMPER-SMT_3_2-NC_TRACE_SILK  [SMT-JUMPER_3_2-NC_TRACE_SILK]  118.36,35.69 0 bottom
JP19  JUMPER-SMT_3_1-NC_TRACE_SILK  [SMT-JUMPER_3_1-NC_TRACE_SILK]  102.11,13.97 180 bottom
JP20  JUMPER-SMT_3_1-NC_TRACE_SILK  [SMT-JUMPER_3_1-NC_TRACE_SILK]  102.11,16.13 180 bottom
JP21  STAND-OFF  [STAND-OFF]  125.22,9.4 0 top
JP22  STAND-OFF  [STAND-OFF]  158.24,9.4 0 top
JP23  FIDUCIAL1X2  [FIDUCIAL-1X2]  155.7,8.13 0 top
JP24  FIDUCIAL1X2  [FIDUCIAL-1X2]  127.76,43.69 0 top
JP25  JUMPER-SMT_3_2-NC_TRACE_SILK  [SMT-JUMPER_3_2-NC_TRACE_SILK]  156.97,35.69 0 bottom
JP26  JUMPER-SMT_3_1-NC_TRACE_SILK  [SMT-JUMPER_3_1-NC_TRACE_SILK]  140.72,13.97 180 bottom
JP27  JUMPER-SMT_3_1-NC_TRACE_SILK  [SMT-JUMPER_3_1-NC_TRACE_SILK]  140.72,16.13 180 bottom
JP28  STAND-OFF  [STAND-OFF]  9.4,48.01 0 top
JP29  STAND-OFF  [STAND-OFF]  42.42,48.01 0 top
JP30  FIDUCIAL1X2  [FIDUCIAL-1X2]  39.88,46.74 0 top
JP31  FIDUCIAL1X2  [FIDUCIAL-1X2]  11.94,82.3 0 top
JP32  JUMPER-SMT_3_2-NC_TRACE_SILK  [SMT-JUMPER_3_2-NC_TRACE_SILK]  41.15,74.3 0 bottom
JP33  JUMPER-SMT_3_1-NC_TRACE_SILK  [SMT-JUMPER_3_1-NC_TRACE_SILK]  24.89,52.58 180 bottom
JP34  JUMPER-SMT_3_1-NC_TRACE_SILK  [SMT-JUMPER_3_1-NC_TRACE_SILK]  24.89,54.74 180 bottom
JP35  STAND-OFF  [STAND-OFF]  48.01,48.01 0 top
JP36  STAND-OFF  [STAND-OFF]  81.03,48.01 0 top
JP37  FIDUCIAL1X2  [FIDUCIAL-1X2]  78.49,46.74 0 top
JP38  FIDUCIAL1X2  [FIDUCIAL-1X2]  50.55,82.3 0 top
JP39  JUMPER-SMT_3_2-NC_TRACE_SILK  [SMT-JUMPER_3_2-NC_TRACE_SILK]  79.76,74.3 0 bottom
JP40  JUMPER-SMT_3_1-NC_TRACE_SILK  [SMT-JUMPER_3_1-NC_TRACE_SILK]  63.5,52.58 180 bottom
JP41  JUMPER-SMT_3_1-NC_TRACE_SILK  [SMT-JUMPER_3_1-NC_TRACE_SILK]  63.5,54.74 180 bottom
JP42  STAND-OFF  [STAND-OFF]  86.61,48.01 0 top
JP43  STAND-OFF  [STAND-OFF]  119.63,48.01 0 top
JP44  FIDUCIAL1X2  [FIDUCIAL-1X2]  117.09,46.74 0 top
JP45  FIDUCIAL1X2  [FIDUCIAL-1X2]  89.15,82.3 0 top
JP46  JUMPER-SMT_3_2-NC_TRACE_SILK  [SMT-JUMPER_3_2-NC_TRACE_SILK]  118.36,74.3 0 bottom
JP47  JUMPER-SMT_3_1-NC_TRACE_SILK  [SMT-JUMPER_3_1-NC_TRACE_SILK]  102.11,52.58 180 bottom
JP48  JUMPER-SMT_3_1-NC_TRACE_SILK  [SMT-JUMPER_3_1-NC_TRACE_SILK]  102.11,54.74 180 bottom
JP49  STAND-OFF  [STAND-OFF]  125.22,48.01 0 top
JP50  STAND-OFF  [STAND-OFF]  158.24,48.01 0 top
JP51  FIDUCIAL1X2  [FIDUCIAL-1X2]  155.7,46.74 0 top
JP52  FIDUCIAL1X2  [FIDUCIAL-1X2]  127.76,82.3 0 top
JP53  JUMPER-SMT_3_2-NC_TRACE_SILK  [SMT-JUMPER_3_2-NC_TRACE_SILK]  156.97,74.3 0 bottom
JP54  JUMPER-SMT_3_1-NC_TRACE_SILK  [SMT-JUMPER_3_1-NC_TRACE_SILK]  140.72,52.58 180 bottom
JP55  JUMPER-SMT_3_1-NC_TRACE_SILK  [SMT-JUMPER_3_1-NC_TRACE_SILK]  140.72,54.74 180 bottom
JP56  STAND-OFF  [STAND-OFF]  9.4,86.61 0 top
JP57  STAND-OFF  [STAND-OFF]  42.42,86.61 0 top
JP58  FIDUCIAL1X2  [FIDUCIAL-1X2]  39.88,85.34 0 top
JP59  FIDUCIAL1X2  [FIDUCIAL-1X2]  11.94,120.9 0 top
JP60  JUMPER-SMT_3_2-NC_TRACE_SILK  [SMT-JUMPER_3_2-NC_TRACE_SILK]  41.15,112.9 0 bottom
JP61  JUMPER-SMT_3_1-NC_TRACE_SILK  [SMT-JUMPER_3_1-NC_TRACE_SILK]  24.89,91.19 180 bottom
JP62  JUMPER-SMT_3_1-NC_TRACE_SILK  [SMT-JUMPER_3_1-NC_TRACE_SILK]  24.89,93.34 180 bottom
JP63  STAND-OFF  [STAND-OFF]  48.01,86.61 0 top
JP64  STAND-OFF  [STAND-OFF]  81.03,86.61 0 top
JP65  FIDUCIAL1X2  [FIDUCIAL-1X2]  78.49,85.34 0 top
JP66  FIDUCIAL1X2  [FIDUCIAL-1X2]  50.55,120.9 0 top
JP67  JUMPER-SMT_3_2-NC_TRACE_SILK  [SMT-JUMPER_3_2-NC_TRACE_SILK]  79.76,112.9 0 bottom
JP68  JUMPER-SMT_3_1-NC_TRACE_SILK  [SMT-JUMPER_3_1-NC_TRACE_SILK]  63.5,91.19 180 bottom
JP69  JUMPER-SMT_3_1-NC_TRACE_SILK  [SMT-JUMPER_3_1-NC_TRACE_SILK]  63.5,93.34 180 bottom
JP70  STAND-OFF  [STAND-OFF]  86.61,86.61 0 top
JP71  STAND-OFF  [STAND-OFF]  119.63,86.61 0 top
JP72  FIDUCIAL1X2  [FIDUCIAL-1X2]  117.09,85.34 0 top
JP73  FIDUCIAL1X2  [FIDUCIAL-1X2]  89.15,120.9 0 top
JP74  JUMPER-SMT_3_2-NC_TRACE_SILK  [SMT-JUMPER_3_2-NC_TRACE_SILK]  118.36,112.9 0 bottom
JP75  JUMPER-SMT_3_1-NC_TRACE_SILK  [SMT-JUMPER_3_1-NC_TRACE_SILK]  102.11,91.19 180 bottom
JP76  JUMPER-SMT_3_1-NC_TRACE_SILK  [SMT-JUMPER_3_1-NC_TRACE_SILK]  102.11,93.34 180 bottom
JP77  STAND-OFF  [STAND-OFF]  125.22,86.61 0 top
JP78  STAND-OFF  [STAND-OFF]  158.24,86.61 0 top
JP79  FIDUCIAL1X2  [FIDUCIAL-1X2]  155.7,85.34 0 top
JP80  FIDUCIAL1X2  [FIDUCIAL-1X2]  127.76,120.9 0 top
JP81  JUMPER-SMT_3_2-NC_TRACE_SILK  [SMT-JUMPER_3_2-NC_TRACE_SILK]  156.97,112.9 0 bottom
JP82  JUMPER-SMT_3_1-NC_TRACE_SILK  [SMT-JUMPER_3_1-NC_TRACE_SILK]  140.72,91.19 180 bottom
JP83  JUMPER-SMT_3_1-NC_TRACE_SILK  [SMT-JUMPER_3_1-NC_TRACE_SILK]  140.72,93.34 180 bottom
JP84  STAND-OFF  [STAND-OFF]  9.4,125.22 0 top
JP85  STAND-OFF  [STAND-OFF]  42.42,125.22 0 top
JP86  FIDUCIAL1X2  [FIDUCIAL-1X2]  39.88,123.95 0 top
JP87  FIDUCIAL1X2  [FIDUCIAL-1X2]  11.94,159.51 0 top
JP88  JUMPER-SMT_3_2-NC_TRACE_SILK  [SMT-JUMPER_3_2-NC_TRACE_SILK]  41.15,151.51 0 bottom
JP89  JUMPER-SMT_3_1-NC_TRACE_SILK  [SMT-JUMPER_3_1-NC_TRACE_SILK]  24.89,129.79 180 bottom
JP90  JUMPER-SMT_3_1-NC_TRACE_SILK  [SMT-JUMPER_3_1-NC_TRACE_SILK]  24.89,131.95 180 bottom
JP91  STAND-OFF  [STAND-OFF]  48.01,125.22 0 top
JP92  STAND-OFF  [STAND-OFF]  81.03,125.22 0 top
JP93  FIDUCIAL1X2  [FIDUCIAL-1X2]  78.49,123.95 0 top
JP94  FIDUCIAL1X2  [FIDUCIAL-1X2]  50.55,159.51 0 top
JP95  JUMPER-SMT_3_2-NC_TRACE_SILK  [SMT-JUMPER_3_2-NC_TRACE_SILK]  79.76,151.51 0 bottom
JP96  JUMPER-SMT_3_1-NC_TRACE_SILK  [SMT-JUMPER_3_1-NC_TRACE_SILK]  63.5,129.79 180 bottom
JP97  JUMPER-SMT_3_1-NC_TRACE_SILK  [SMT-JUMPER_3_1-NC_TRACE_SILK]  63.5,131.95 180 bottom
JP98  STAND-OFF  [STAND-OFF]  86.61,125.22 0 top
JP99  STAND-OFF  [STAND-OFF]  119.63,125.22 0 top
JP100  FIDUCIAL1X2  [FIDUCIAL-1X2]  117.09,123.95 0 top
JP101  FIDUCIAL1X2  [FIDUCIAL-1X2]  89.15,159.51 0 top
JP102  JUMPER-SMT_3_2-NC_TRACE_SILK  [SMT-JUMPER_3_2-NC_TRACE_SILK]  118.36,151.51 0 bottom
JP103  JUMPER-SMT_3_1-NC_TRACE_SILK  [SMT-JUMPER_3_1-NC_TRACE_SILK]  102.11,129.79 180 bottom
JP104  JUMPER-SMT_3_1-NC_TRACE_SILK  [SMT-JUMPER_3_1-NC_TRACE_SILK]  102.11,131.95 180 bottom
JP105  STAND-OFF  [STAND-OFF]  125.22,125.22 0 top
JP106  STAND-OFF  [STAND-OFF]  158.24,125.22 0 top
JP107  FIDUCIAL1X2  [FIDUCIAL-1X2]  155.7,123.95 0 top
JP108  FIDUCIAL1X2  [FIDUCIAL-1X2]  127.76,159.51 0 top
JP109  JUMPER-SMT_3_2-NC_TRACE_SILK  [SMT-JUMPER_3_2-NC_TRACE_SILK]  156.97,151.51 0 bottom
JP110  JUMPER-SMT_3_1-NC_TRACE_SILK  [SMT-JUMPER_3_1-NC_TRACE_SILK]  140.72,129.79 180 bottom
JP111  JUMPER-SMT_3_1-NC_TRACE_SILK  [SMT-JUMPER_3_1-NC_TRACE_SILK]  140.72,131.95 180 bottom
LED  JUMPER-SMT_2_NC_TRACE_SILK  [SMT-JUMPER_2_NC_TRACE_SILK]  10.67,30.61 270 bottom
LED1  JUMPER-SMT_2_NC_TRACE_SILK  [SMT-JUMPER_2_NC_TRACE_SILK]  49.28,30.61 270 bottom
LED2  JUMPER-SMT_2_NC_TRACE_SILK  [SMT-JUMPER_2_NC_TRACE_SILK]  87.88,30.61 270 bottom
LED3  JUMPER-SMT_2_NC_TRACE_SILK  [SMT-JUMPER_2_NC_TRACE_SILK]  126.49,30.61 270 bottom
LED4  JUMPER-SMT_2_NC_TRACE_SILK  [SMT-JUMPER_2_NC_TRACE_SILK]  10.67,69.22 270 bottom
LED5  JUMPER-SMT_2_NC_TRACE_SILK  [SMT-JUMPER_2_NC_TRACE_SILK]  49.28,69.22 270 bottom
LED6  JUMPER-SMT_2_NC_TRACE_SILK  [SMT-JUMPER_2_NC_TRACE_SILK]  87.88,69.22 270 bottom
LED7  JUMPER-SMT_2_NC_TRACE_SILK  [SMT-JUMPER_2_NC_TRACE_SILK]  126.49,69.22 270 bottom
LED8  JUMPER-SMT_2_NC_TRACE_SILK  [SMT-JUMPER_2_NC_TRACE_SILK]  10.67,107.82 270 bottom
LED9  JUMPER-SMT_2_NC_TRACE_SILK  [SMT-JUMPER_2_NC_TRACE_SILK]  49.28,107.82 270 bottom
LED10  JUMPER-SMT_2_NC_TRACE_SILK  [SMT-JUMPER_2_NC_TRACE_SILK]  87.88,107.82 270 bottom
LED11  JUMPER-SMT_2_NC_TRACE_SILK  [SMT-JUMPER_2_NC_TRACE_SILK]  126.49,107.82 270 bottom
LED12  JUMPER-SMT_2_NC_TRACE_SILK  [SMT-JUMPER_2_NC_TRACE_SILK]  10.67,146.43 270 bottom
LED13  JUMPER-SMT_2_NC_TRACE_SILK  [SMT-JUMPER_2_NC_TRACE_SILK]  49.28,146.43 270 bottom
LED14  JUMPER-SMT_2_NC_TRACE_SILK  [SMT-JUMPER_2_NC_TRACE_SILK]  87.88,146.43 270 bottom
LED15  JUMPER-SMT_2_NC_TRACE_SILK  [SMT-JUMPER_2_NC_TRACE_SILK]  126.49,146.43 270 bottom
LOGO1  OSHW-LOGOMINI  [OSHW-LOGO-MINI]  36.83,16 0 top
LOGO2  OSHW-LOGOMINI  [OSHW-LOGO-MINI]  75.44,16 0 top
LOGO3  OSHW-LOGOMINI  [OSHW-LOGO-MINI]  114.05,16 0 top
LOGO4  OSHW-LOGOMINI  [OSHW-LOGO-MINI]  152.65,16 0 top
LOGO5  OSHW-LOGOMINI  [OSHW-LOGO-MINI]  36.83,54.61 0 top
LOGO6  OSHW-LOGOMINI  [OSHW-LOGO-MINI]  75.44,54.61 0 top
LOGO7  OSHW-LOGOMINI  [OSHW-LOGO-MINI]  114.05,54.61 0 top
LOGO8  OSHW-LOGOMINI  [OSHW-LOGO-MINI]  152.65,54.61 0 top
LOGO9  OSHW-LOGOMINI  [OSHW-LOGO-MINI]  36.83,93.22 0 top
LOGO10  OSHW-LOGOMINI  [OSHW-LOGO-MINI]  75.44,93.22 0 top
LOGO11  OSHW-LOGOMINI  [OSHW-LOGO-MINI]  114.05,93.22 0 top
LOGO12  OSHW-LOGOMINI  [OSHW-LOGO-MINI]  152.65,93.22 0 top
LOGO13  OSHW-LOGOMINI  [OSHW-LOGO-MINI]  36.83,131.83 0 top
LOGO14  OSHW-LOGOMINI  [OSHW-LOGO-MINI]  75.44,131.83 0 top
LOGO15  OSHW-LOGOMINI  [OSHW-LOGO-MINI]  114.05,131.83 0 top
LOGO16  OSHW-LOGOMINI  [OSHW-LOGO-MINI]  152.65,131.83 0 top
R1  1k  [0603]  10.67,33.53 180 top
R2  2.2k  [0603]  42.42,32.26 90 top
R3  2.2k  [0603]  39.88,32.26 90 top
R4  10k  [0603]  20.83,16.38 270 top
R5  10k  [0603]  21.21,28.45 90 top
R6  2.2k  [0603]  30.86,28.45 270 top
R7  2.2k  [0603]  27.81,28.45 270 top
R8  3.9k  [0603]  30.61,23.37 180 top
R9  1620  [0603]  33.53,20.83 90 top
R10  3.9k  [0603]  30.61,18.29 180 top
R11  2.2k  [0603]  81.03,32.26 90 top
R12  2.2k  [0603]  78.49,32.26 90 top
R13  10k  [0603]  59.44,16.38 270 top
R14  1k  [0603]  49.28,33.53 180 top
R15  10k  [0603]  59.82,28.45 90 top
R16  2.2k  [0603]  69.47,28.45 270 top
R17  2.2k  [0603]  66.42,28.45 270 top
R18  3.9k  [0603]  69.22,23.37 180 top
R19  1620  [0603]  72.14,20.83 90 top
R20  3.9k  [0603]  69.22,18.29 180 top
R21  2.2k  [0603]  119.63,32.26 90 top
R22  2.2k  [0603]  117.09,32.26 90 top
R23  10k  [0603]  98.04,16.38 270 top
R24  1k  [0603]  87.88,33.53 180 top
R25  10k  [0603]  98.42,28.45 90 top
R26  2.2k  [0603]  108.08,28.45 270 top
R27  2.2k  [0603]  105.03,28.45 270 top
R28  3.9k  [0603]  107.82,23.37 180 top
R29  1620  [0603]  110.74,20.83 90 top
R30  3.9k  [0603]  107.82,18.29 180 top
R31  2.2k  [0603]  158.24,32.26 90 top
R32  2.2k  [0603]  155.7,32.26 90 top
R33  10k  [0603]  136.65,16.38 270 top
R34  1k  [0603]  126.49,33.53 180 top
R35  10k  [0603]  137.03,28.45 90 top
R36  2.2k  [0603]  146.69,28.45 270 top
R37  2.2k  [0603]  143.64,28.45 270 top
R38  3.9k  [0603]  146.43,23.37 180 top
R39  1620  [0603]  149.35,20.83 90 top
R40  3.9k  [0603]  146.43,18.29 180 top
R41  2.2k  [0603]  42.42,70.87 90 top
R42  2.2k  [0603]  39.88,70.87 90 top
R43  10k  [0603]  20.83,54.99 270 top
R44  1k  [0603]  10.67,72.14 180 top
R45  10k  [0603]  21.21,67.06 90 top
R46  2.2k  [0603]  30.86,67.06 270 top
R47  2.2k  [0603]  27.81,67.06 270 top
R48  3.9k  [0603]  30.61,61.98 180 top
R49  1620  [0603]  33.53,59.44 90 top
R50  3.9k  [0603]  30.61,56.9 180 top
R51  2.2k  [0603]  81.03,70.87 90 top
R52  2.2k  [0603]  78.49,70.87 90 top
R53  10k  [0603]  59.44,54.99 270 top
R54  1k  [0603]  49.28,72.14 180 top
R55  10k  [0603]  59.82,67.06 90 top
R56  2.2k  [0603]  69.47,67.06 270 top
R57  2.2k  [0603]  66.42,67.06 270 top
R58  3.9k  [0603]  69.22,61.98 180 top
R59  1620  [0603]  72.14,59.44 90 top
R60  3.9k  [0603]  69.22,56.9 180 top
R61  2.2k  [0603]  119.63,70.87 90 top
R62  2.2k  [0603]  117.09,70.87 90 top
R63  10k  [0603]  98.04,54.99 270 top
R64  1k  [0603]  87.88,72.14 180 top
R65  10k  [0603]  98.42,67.06 90 top
R66  2.2k  [0603]  108.08,67.06 270 top
R67  2.2k  [0603]  105.03,67.06 270 top
R68  3.9k  [0603]  107.82,61.98 180 top
R69  1620  [0603]  110.74,59.44 90 top
R70  3.9k  [0603]  107.82,56.9 180 top
R71  2.2k  [0603]  158.24,70.87 90 top
R72  2.2k  [0603]  155.7,70.87 90 top
R73  10k  [0603]  136.65,54.99 270 top
R74  1k  [0603]  126.49,72.14 180 top
R75  10k  [0603]  137.03,67.06 90 top
R76  2.2k  [0603]  146.69,67.06 270 top
R77  2.2k  [0603]  143.64,67.06 270 top
R78  3.9k  [0603]  146.43,61.98 180 top
R79  1620  [0603]  149.35,59.44 90 top
R80  3.9k  [0603]  146.43,56.9 180 top
R81  2.2k  [0603]  42.42,109.47 90 top
R82  2.2k  [0603]  39.88,109.47 90 top
R83  10k  [0603]  20.83,93.6 270 top
R84  1k  [0603]  10.67,110.74 180 top
R85  10k  [0603]  21.21,105.66 90 top
R86  2.2k  [0603]  30.86,105.66 270 top
R87  2.2k  [0603]  27.81,105.66 270 top
R88  3.9k  [0603]  30.61,100.58 180 top
R89  1620  [0603]  33.53,98.04 90 top
R90  3.9k  [0603]  30.61,95.5 180 top
R91  2.2k  [0603]  81.03,109.47 90 top
R92  2.2k  [0603]  78.49,109.47 90 top
R93  10k  [0603]  59.44,93.6 270 top
R94  1k  [0603]  49.28,110.74 180 top
R95  10k  [0603]  59.82,105.66 90 top
R96  2.2k  [0603]  69.47,105.66 270 top
R97  2.2k  [0603]  66.42,105.66 270 top
R98  3.9k  [0603]  69.22,100.58 180 top
R99  1620  [0603]  72.14,98.04 90 top
R100  3.9k  [0603]  69.22,95.5 180 top
R101  2.2k  [0603]  119.63,109.47 90 top
R102  2.2k  [0603]  117.09,109.47 90 top
R103  10k  [0603]  98.04,93.6 270 top
R104  1k  [0603]  87.88,110.74 180 top
R105  10k  [0603]  98.42,105.66 90 top
R106  2.2k  [0603]  108.08,105.66 270 top
R107  2.2k  [0603]  105.03,105.66 270 top
R108  3.9k  [0603]  107.82,100.58 180 top
R109  1620  [0603]  110.74,98.04 90 top
R110  3.9k  [0603]  107.82,95.5 180 top
R111  2.2k  [0603]  158.24,109.47 90 top
R112  2.2k  [0603]  155.7,109.47 90 top
R113  10k  [0603]  136.65,93.6 270 top
R114  1k  [0603]  126.49,110.74 180 top
R115  10k  [0603]  137.03,105.66 90 top
R116  2.2k  [0603]  146.69,105.66 270 top
R117  2.2k  [0603]  143.64,105.66 270 top
R118  3.9k  [0603]  146.43,100.58 180 top
R119  1620  [0603]  149.35,98.04 90 top
R120  3.9k  [0603]  146.43,95.5 180 top
R121  2.2k  [0603]  42.42,148.08 90 top
R122  2.2k  [0603]  39.88,148.08 90 top
R123  10k  [0603]  20.83,132.21 270 top
R124  1k  [0603]  10.67,149.35 180 top
R125  10k  [0603]  21.21,144.27 90 top
R126  2.2k  [0603]  30.86,144.27 270 top
R127  2.2k  [0603]  27.81,144.27 270 top
R128  3.9k  [0603]  30.61,139.19 180 top
R129  1620  [0603]  33.53,136.65 90 top
R130  3.9k  [0603]  30.61,134.11 180 top
R131  2.2k  [0603]  81.03,148.08 90 top
R132  2.2k  [0603]  78.49,148.08 90 top
R133  10k  [0603]  59.44,132.21 270 top
R134  1k  [0603]  49.28,149.35 180 top
R135  10k  [0603]  59.82,144.27 90 top
R136  2.2k  [0603]  69.47,144.27 270 top
R137  2.2k  [0603]  66.42,144.27 270 top
R138  3.9k  [0603]  69.22,139.19 180 top
R139  1620  [0603]  72.14,136.65 90 top
R140  3.9k  [0603]  69.22,134.11 180 top
R141  2.2k  [0603]  119.63,148.08 90 top
R142  2.2k  [0603]  117.09,148.08 90 top
R143  10k  [0603]  98.04,132.21 270 top
R144  1k  [0603]  87.88,149.35 180 top
R145  10k  [0603]  98.42,144.27 90 top
R146  2.2k  [0603]  108.08,144.27 270 top
R147  2.2k  [0603]  105.03,144.27 270 top
R148  3.9k  [0603]  107.82,139.19 180 top
R149  1620  [0603]  110.74,136.65 90 top
R150  3.9k  [0603]  107.82,134.11 180 top
R151  2.2k  [0603]  158.24,148.08 90 top
R152  2.2k  [0603]  155.7,148.08 90 top
R153  10k  [0603]  136.65,132.21 270 top
R154  1k  [0603]  126.49,149.35 180 top
R155  10k  [0603]  137.03,144.27 90 top
R156  2.2k  [0603]  146.69,144.27 270 top
R157  2.2k  [0603]  143.64,144.27 270 top
R158  3.9k  [0603]  146.43,139.19 180 top
R159  1620  [0603]  149.35,136.65 90 top
R160  3.9k  [0603]  146.43,134.11 180 top
TP1  TEST-POINTTP_15TH_THRU  [TP_15TH]  17.02,39.88 0 top
TP2  TEST-POINTTP_15TH_THRU  [TP_15TH]  22.1,39.88 0 top
TP3  TEST-POINTTP_15TH_THRU  [TP_15TH]  27.18,39.88 0 top
TP4  TEST-POINTTP_15TH_THRU  [TP_15TH]  32.26,39.88 0 top
TP5  TEST-POINTTP_15TH_THRU  [TP_15TH]  55.63,39.88 0 top
TP6  TEST-POINTTP_15TH_THRU  [TP_15TH]  60.71,39.88 0 top
TP7  TEST-POINTTP_15TH_THRU  [TP_15TH]  65.79,39.88 0 top
TP8  TEST-POINTTP_15TH_THRU  [TP_15TH]  70.87,39.88 0 top
TP9  TEST-POINTTP_15TH_THRU  [TP_15TH]  94.23,39.88 0 top
TP10  TEST-POINTTP_15TH_THRU  [TP_15TH]  99.31,39.88 0 top
TP11  TEST-POINTTP_15TH_THRU  [TP_15TH]  104.39,39.88 0 top
TP12  TEST-POINTTP_15TH_THRU  [TP_15TH]  109.47,39.88 0 top
TP13  TEST-POINTTP_15TH_THRU  [TP_15TH]  132.84,39.88 0 top
TP14  TEST-POINTTP_15TH_THRU  [TP_15TH]  137.92,39.88 0 top
TP15  TEST-POINTTP_15TH_THRU  [TP_15TH]  143,39.88 0 top
TP16  TEST-POINTTP_15TH_THRU  [TP_15TH]  148.08,39.88 0 top
TP17  TEST-POINTTP_15TH_THRU  [TP_15TH]  17.02,78.49 0 top
TP18  TEST-POINTTP_15TH_THRU  [TP_15TH]  22.1,78.49 0 top
TP19  TEST-POINTTP_15TH_THRU  [TP_15TH]  27.18,78.49 0 top
TP20  TEST-POINTTP_15TH_THRU  [TP_15TH]  32.26,78.49 0 top
TP21  TEST-POINTTP_15TH_THRU  [TP_15TH]  55.63,78.49 0 top
TP22  TEST-POINTTP_15TH_THRU  [TP_15TH]  60.71,78.49 0 top
TP23  TEST-POINTTP_15TH_THRU  [TP_15TH]  65.79,78.49 0 top
TP24  TEST-POINTTP_15TH_THRU  [TP_15TH]  70.87,78.49 0 top
TP25  TEST-POINTTP_15TH_THRU  [TP_15TH]  94.23,78.49 0 top
TP26  TEST-POINTTP_15TH_THRU  [TP_15TH]  99.31,78.49 0 top
TP27  TEST-POINTTP_15TH_THRU  [TP_15TH]  104.39,78.49 0 top
TP28  TEST-POINTTP_15TH_THRU  [TP_15TH]  109.47,78.49 0 top
TP29  TEST-POINTTP_15TH_THRU  [TP_15TH]  132.84,78.49 0 top
TP30  TEST-POINTTP_15TH_THRU  [TP_15TH]  137.92,78.49 0 top
TP31  TEST-POINTTP_15TH_THRU  [TP_15TH]  143,78.49 0 top
TP32  TEST-POINTTP_15TH_THRU  [TP_15TH]  148.08,78.49 0 top
TP33  TEST-POINTTP_15TH_THRU  [TP_15TH]  17.02,117.09 0 top
TP34  TEST-POINTTP_15TH_THRU  [TP_15TH]  22.1,117.09 0 top
TP35  TEST-POINTTP_15TH_THRU  [TP_15TH]  27.18,117.09 0 top
TP36  TEST-POINTTP_15TH_THRU  [TP_15TH]  32.26,117.09 0 top
TP37  TEST-POINTTP_15TH_THRU  [TP_15TH]  55.63,117.09 0 top
TP38  TEST-POINTTP_15TH_THRU  [TP_15TH]  60.71,117.09 0 top
TP39  TEST-POINTTP_15TH_THRU  [TP_15TH]  65.79,117.09 0 top
TP40  TEST-POINTTP_15TH_THRU  [TP_15TH]  70.87,117.09 0 top
TP41  TEST-POINTTP_15TH_THRU  [TP_15TH]  94.23,117.09 0 top
TP42  TEST-POINTTP_15TH_THRU  [TP_15TH]  99.31,117.09 0 top
TP43  TEST-POINTTP_15TH_THRU  [TP_15TH]  104.39,117.09 0 top
TP44  TEST-POINTTP_15TH_THRU  [TP_15TH]  109.47,117.09 0 top
TP45  TEST-POINTTP_15TH_THRU  [TP_15TH]  132.84,117.09 0 top
TP46  TEST-POINTTP_15TH_THRU  [TP_15TH]  137.92,117.09 0 top
TP47  TEST-POINTTP_15TH_THRU  [TP_15TH]  143,117.09 0 top
TP48  TEST-POINTTP_15TH_THRU  [TP_15TH]  148.08,117.09 0 top
TP49  TEST-POINTTP_15TH_THRU  [TP_15TH]  17.02,155.7 0 top
TP50  TEST-POINTTP_15TH_THRU  [TP_15TH]  22.1,155.7 0 top
TP51  TEST-POINTTP_15TH_THRU  [TP_15TH]  27.18,155.7 0 top
TP52  TEST-POINTTP_15TH_THRU  [TP_15TH]  32.26,155.7 0 top
TP53  TEST-POINTTP_15TH_THRU  [TP_15TH]  55.63,155.7 0 top
TP54  TEST-POINTTP_15TH_THRU  [TP_15TH]  60.71,155.7 0 top
TP55  TEST-POINTTP_15TH_THRU  [TP_15TH]  65.79,155.7 0 top
TP56  TEST-POINTTP_15TH_THRU  [TP_15TH]  70.87,155.7 0 top
TP57  TEST-POINTTP_15TH_THRU  [TP_15TH]  94.23,155.7 0 top
TP58  TEST-POINTTP_15TH_THRU  [TP_15TH]  99.31,155.7 0 top
TP59  TEST-POINTTP_15TH_THRU  [TP_15TH]  104.39,155.7 0 top
TP60  TEST-POINTTP_15TH_THRU  [TP_15TH]  109.47,155.7 0 top
TP61  TEST-POINTTP_15TH_THRU  [TP_15TH]  132.84,155.7 0 top
TP62  TEST-POINTTP_15TH_THRU  [TP_15TH]  137.92,155.7 0 top
TP63  TEST-POINTTP_15TH_THRU  [TP_15TH]  143,155.7 0 top
TP64  TEST-POINTTP_15TH_THRU  [TP_15TH]  148.08,155.7 0 top
U$1  SPARKX-LOGO3  [SPARKX-SMALL]  37.34,14.48 0 bottom
U$2  SPARKX-LOGO3  [SPARKX-SMALL]  13.34,19.05 0 top
U$3  [3V33]  27.18,13.34 270 top
U$4  [_1_0]  18.41,40 90 bottom
U$5  [A11]  30.35,14.1 0 bottom
U$6  [_2_0]  23.37,39.62 90 bottom
U$7  [GND4]  24.64,13.34 270 top
U$8  [PT1000]  8.89,14.35 0 top
U$9  [SCL6]  32.26,13.08 270 top
U$10  [SDA5]  29.72,13.21 270 top
U$11  [A00]  30.61,16.13 0 bottom
U$12  [_3_0]  28.45,39.62 90 bottom
U$13  [_4_0]  33.4,39.62 90 bottom
U$14  [#DRDY0]  19.56,13.84 270 top
U$15  [#DRDY0]  19.56,8.51 90 bottom
U$16  [#RESET0]  22.1,14.22 270 top
U$17  [#RESET0]  22.1,8.25 90 bottom
U$18  [A0]  22.73,37.59 0 bottom
U$19  [B0]  27.56,37.59 0 bottom
U$20  [I_SUPER2_C-()-03]  42.54,37.59 0 bottom
U$21  [40]  41.91,37.34 0 top
U$22  [C0]  32.77,37.59 0 bottom
U$23  [SCL0]  32.26,8.64 90 bottom
U$24  [SDA1]  29.72,8.51 90 bottom
U$25  [GND4]  24.64,8.51 90 bottom
U$26  [3V33]  27.18,8.64 90 bottom
U$27  [31]  39.88,37.34 0 top
U$28  [20]  37.97,37.34 0 top
U$29  [15]  24.64,26.8 0 bottom
U$30  [40]  33.53,26.8 0 bottom
U$31  [2#WIRE#0]  42.42,20.83 0 bottom
U$32  [QWIIC1]  9.14,16.51 0 top
U$33  [20]  26.16,26.8 0 bottom
U$34  [31]  32.38,26.8 0 bottom
U$35  [15]  36.32,37.34 0 top
U$36  [3#WIRE#0]  42.42,24.64 0 bottom
U$37  [20]  26.16,22.99 0 bottom
U$38  [31]  32.38,22.99 0 bottom
U$39  [PWR0]  8.25,37.85 0 top
U$40  [PWR0]  8.38,28.07 90 bottom
U$41  [4#WIRE#0]  42.42,28.45 0 bottom
U$42  [SHORT_A_#_B0]  24.26,24.64 0 bottom
U$43  [SHORT_A_#_C0]  24.26,20.83 0 bottom
U$44  [40]  33.53,22.99 0 bottom
U$45  SPARKX-LOGO3  [SPARKX-SMALL]  51.94,19.05 0 top
U$46  [20]  26.16,19.18 0 bottom
U$47  [31]  32.38,19.18 0 bottom
U$48  SPARKX-LOGO3  [SPARKX-SMALL]  75.95,14.48 0 bottom
U$49  [3V33]  65.79,13.34 270 top
U$50  [A11]  68.96,14.1 0 bottom
U$51  [GND4]  63.25,13.34 270 top
U$52  [SCL6]  70.87,13.08 270 top
U$53  [SDA5]  68.33,13.21 270 top
U$54  [A00]  69.22,16.13 0 bottom
U$55  [I_SUPER2_C-()-03]  81.15,37.59 0 bottom
U$56  [SCL0]  70.87,8.64 90 bottom
U$57  [SDA1]  68.33,8.51 90 bottom
U$58  [GND4]  63.25,8.51 90 bottom
U$59  [3V33]  65.79,8.64 90 bottom
U$60  [QWIIC1]  47.75,16.51 0 top
U$61  [15]  63.25,26.8 0 bottom
U$62  [20]  64.77,26.8 0 bottom
U$63  [31]  70.99,26.8 0 bottom
U$64  [PWR0]  46.86,37.85 0 top
U$65  [PWR0]  46.99,28.07 90 bottom
U$66  [_1_0]  57.02,40 90 bottom
U$67  [_2_0]  61.98,39.62 90 bottom
U$68  [_3_0]  67.06,39.62 90 bottom
U$69  [_4_0]  72.01,39.62 90 bottom
U$70  [#DRDY0]  58.17,13.84 270 top
U$71  [#DRDY0]  58.17,8.51 90 bottom
U$72  [#RESET0]  60.71,14.22 270 top
U$73  [#RESET0]  60.71,8.25 90 bottom
U$74  [A0]  61.34,37.59 0 bottom
U$75  [B0]  66.17,37.59 0 bottom
U$76  [C0]  71.37,37.59 0 bottom
U$77  [40]  72.14,26.8 0 bottom
U$78  [PT1000]  47.5,14.35 0 top
U$79  [2#WIRE#0]  81.03,20.83 0 bottom
U$80  [3#WIRE#0]  81.03,24.64 0 bottom
U$81  [4#WIRE#0]  81.03,28.45 0 bottom
U$82  [SHORT_A_#_B0]  62.86,24.64 0 bottom
U$83  [SHORT_A_#_C0]  62.86,20.83 0 bottom
U$84  [20]  64.77,22.99 0 bottom
U$85  [31]  70.99,22.99 0 bottom
U$86  [40]  72.14,22.99 0 bottom
U$87  [20]  64.77,19.18 0 bottom
U$88  [31]  70.99,19.18 0 bottom
U$89  [40]  80.52,37.34 0 top
U$90  [31]  78.49,37.34 0 top
U$91  [20]  76.58,37.34 0 top
U$92  [15]  74.93,37.34 0 top
U$93  SPARKX-LOGO3  [SPARKX-SMALL]  90.55,19.05 0 top
U$94  SPARKX-LOGO3  [SPARKX-SMALL]  114.55,14.48 0 bottom
U$95  [3V33]  104.39,13.34 270 top
U$96  [A11]  107.57,14.1 0 bottom
U$97  [GND4]  101.85,13.34 270 top
U$98  [SCL6]  109.47,13.08 270 top
U$99  [SDA5]  106.93,13.21 270 top
U$100  [A00]  107.82,16.13 0 bottom
U$101  [I_SUPER2_C-()-03]  119.76,37.59 0 bottom
U$102  [SCL0]  109.47,8.64 90 bottom
U$103  [SDA1]  106.93,8.51 90 bottom
U$104  [GND4]  101.85,8.51 90 bottom
U$105  [3V33]  104.39,8.64 90 bottom
U$106  [QWIIC1]  86.36,16.51 0 top
U$107  [15]  101.85,26.8 0 bottom
U$108  [20]  103.38,26.8 0 bottom
U$109  [31]  109.6,26.8 0 bottom
U$110  [PWR0]  85.47,37.85 0 top
U$111  [PWR0]  85.6,28.07 90 bottom
U$112  [_1_0]  95.63,40 90 bottom
U$113  [_2_0]  100.58,39.62 90 bottom
U$114  [_3_0]  105.66,39.62 90 bottom
U$115  [_4_0]  110.62,39.62 90 bottom
U$116  [#DRDY0]  96.77,13.84 270 top
U$117  [#DRDY0]  96.77,8.51 90 bottom
U$118  [#RESET0]  99.31,14.22 270 top
U$119  [#RESET0]  99.31,8.25 90 bottom
U$120  [A0]  99.95,37.59 0 bottom
U$121  [B0]  104.78,37.59 0 bottom
U$122  [C0]  109.98,37.59 0 bottom
U$123  [40]  110.74,26.8 0 bottom
U$124  [PT1000]  86.11,14.35 0 top
U$125  [2#WIRE#0]  119.63,20.83 0 bottom
U$126  [3#WIRE#0]  119.63,24.64 0 bottom
U$127  [4#WIRE#0]  119.63,28.45 0 bottom
U$128  [SHORT_A_#_B0]  101.47,24.64 0 bottom
U$129  [SHORT_A_#_C0]  101.47,20.83 0 bottom
U$130  [20]  103.38,22.99 0 bottom
U$131  [31]  109.6,22.99 0 bottom
U$132  [40]  110.74,22.99 0 bottom
U$133  [20]  103.38,19.18 0 bottom
U$134  [31]  109.6,19.18 0 bottom
U$135  [40]  119.13,37.34 0 top
U$136  [31]  117.09,37.34 0 top
U$137  [20]  115.19,37.34 0 top
U$138  [15]  113.54,37.34 0 top
U$139  SPARKX-LOGO3  [SPARKX-SMALL]  129.16,19.05 0 top
U$140  SPARKX-LOGO3  [SPARKX-SMALL]  153.16,14.48 0 bottom
U$141  [3V33]  143,13.34 270 top
U$142  [A11]  146.18,14.1 0 bottom
U$143  [GND4]  140.46,13.34 270 top
U$144  [SCL6]  148.08,13.08 270 top
U$145  [SDA5]  145.54,13.21 270 top
U$146  [A00]  146.43,16.13 0 bottom
U$147  [I_SUPER2_C-()-03]  158.37,37.59 0 bottom
U$148  [SCL0]  148.08,8.64 90 bottom
U$149  [SDA1]  145.54,8.51 90 bottom
U$150  [GND4]  140.46,8.51 90 bottom
U$151  [3V33]  143,8.64 90 bottom
U$152  [QWIIC1]  124.97,16.51 0 top
U$153  [15]  140.46,26.8 0 bottom
U$154  [20]  141.99,26.8 0 bottom
U$155  [31]  148.21,26.8 0 bottom
U$156  [PWR0]  124.08,37.85 0 top
U$157  [PWR0]  124.21,28.07 90 bottom
U$158  [_1_0]  134.24,40 90 bottom
U$159  [_2_0]  139.19,39.62 90 bottom
U$160  [_3_0]  144.27,39.62 90 bottom
U$161  [_4_0]  149.22,39.62 90 bottom
U$162  [#DRDY0]  135.38,13.84 270 top
U$163  [#DRDY0]  135.38,8.51 90 bottom
U$164  [#RESET0]  137.92,14.22 270 top
U$165  [#RESET0]  137.92,8.25 90 bottom
U$166  [A0]  138.56,37.59 0 bottom
U$167  [B0]  143.38,37.59 0 bottom
U$168  [C0]  148.59,37.59 0 bottom
U$169  [40]  149.35,26.8 0 bottom
U$170  [PT1000]  124.71,14.35 0 top
U$171  [2#WIRE#0]  158.24,20.83 0 bottom
U$172  [3#WIRE#0]  158.24,24.64 0 bottom
U$173  [4#WIRE#0]  158.24,28.45 0 bottom
U$174  [SHORT_A_#_B0]  140.08,24.64 0 bottom
U$175  [SHORT_A_#_C0]  140.08,20.83 0 bottom
U$176  [20]  141.99,22.99 0 bottom
U$177  [31]  148.21,22.99 0 bottom
U$178  [40]  149.35,22.99 0 bottom
U$179  [20]  141.99,19.18 0 bottom
U$180  [31]  148.21,19.18 0 bottom
U$181  [40]  157.73,37.34 0 top
U$182  [31]  155.7,37.34 0 top
U$183  [20]  153.8,37.34 0 top
U$184  [15]  152.15,37.34 0 top
U$185  SPARKX-LOGO3  [SPARKX-SMALL]  13.34,57.66 0 top
U$186  SPARKX-LOGO3  [SPARKX-SMALL]  37.34,53.09 0 bottom
U$187  [3V33]  27.18,51.94 270 top
U$188  [A11]  30.35,52.7 0 bottom
U$189  [GND4]  24.64,51.94 270 top
U$190  [SCL6]  32.26,51.69 270 top
U$191  [SDA5]  29.72,51.82 270 top
U$192  [A00]  30.61,54.74 0 bottom
U$193  [I_SUPER2_C-()-03]  42.54,76.2 0 bottom
U$194  [SCL0]  32.26,47.24 90 bottom
U$195  [SDA1]  29.72,47.12 90 bottom
U$196  [GND4]  24.64,47.12 90 bottom
U$197  [3V33]  27.18,47.24 90 bottom
U$198  [QWIIC1]  9.14,55.12 0 top
U$199  [15]  24.64,65.41 0 bottom
U$200  [20]  26.16,65.41 0 bottom
U$201  [31]  32.38,65.41 0 bottom
U$202  [PWR0]  8.25,76.45 0 top
U$203  [PWR0]  8.38,66.67 90 bottom
U$204  [_1_0]  18.41,78.61 90 bottom
U$205  [_2_0]  23.37,78.23 90 bottom
U$206  [_3_0]  28.45,78.23 90 bottom
U$207  [_4_0]  33.4,78.23 90 bottom
U$208  [#DRDY0]  19.56,52.45 270 top
U$209  [#DRDY0]  19.56,47.12 90 bottom
U$210  [#RESET0]  22.1,52.83 270 top
U$211  [#RESET0]  22.1,46.86 90 bottom
U$212  [A0]  22.73,76.2 0 bottom
U$213  [B0]  27.56,76.2 0 bottom
U$214  [C0]  32.77,76.2 0 bottom
U$215  [40]  33.53,65.41 0 bottom
U$216  [PT1000]  8.89,52.96 0 top
U$217  [2#WIRE#0]  42.42,59.44 0 bottom
U$218  [3#WIRE#0]  42.42,63.25 0 bottom
U$219  [4#WIRE#0]  42.42,67.06 0 bottom
U$220  [SHORT_A_#_B0]  24.26,63.25 0 bottom
U$221  [SHORT_A_#_C0]  24.26,59.44 0 bottom
U$222  [20]  26.16,61.59 0 bottom
U$223  [31]  32.38,61.59 0 bottom
U$224  [40]  33.53,61.59 0 bottom
U$225  [20]  26.16,57.78 0 bottom
U$226  [31]  32.38,57.78 0 bottom
U$227  [40]  41.91,75.95 0 top
U$228  [31]  39.88,75.95 0 top
U$229  [20]  37.97,75.95 0 top
U$230  [15]  36.32,75.95 0 top
U$231  SPARKX-LOGO3  [SPARKX-SMALL]  51.94,57.66 0 top
U$232  SPARKX-LOGO3  [SPARKX-SMALL]  75.95,53.09 0 bottom
U$233  [3V33]  65.79,51.94 270 top
U$234  [A11]  68.96,52.7 0 bottom
U$235  [GND4]  63.25,51.94 270 top
U$236  [SCL6]  70.87,51.69 270 top
U$237  [SDA5]  68.33,51.82 270 top
U$238  [A00]  69.22,54.74 0 bottom
U$239  [I_SUPER2_C-()-03]  81.15,76.2 0 bottom